# Altium PCB MC15.PcbDoc
Units mm, origin at the board's own origin, x right, y up, seen from the top; angles counter-clockwise.
Board outline 44.17 x 34.76 mm, 6 copper layers (L1, L2, L3, L4, L5, L6), stack 1.839 mm thick; 54 components, 76 nets, 341 pads, 134 vias.
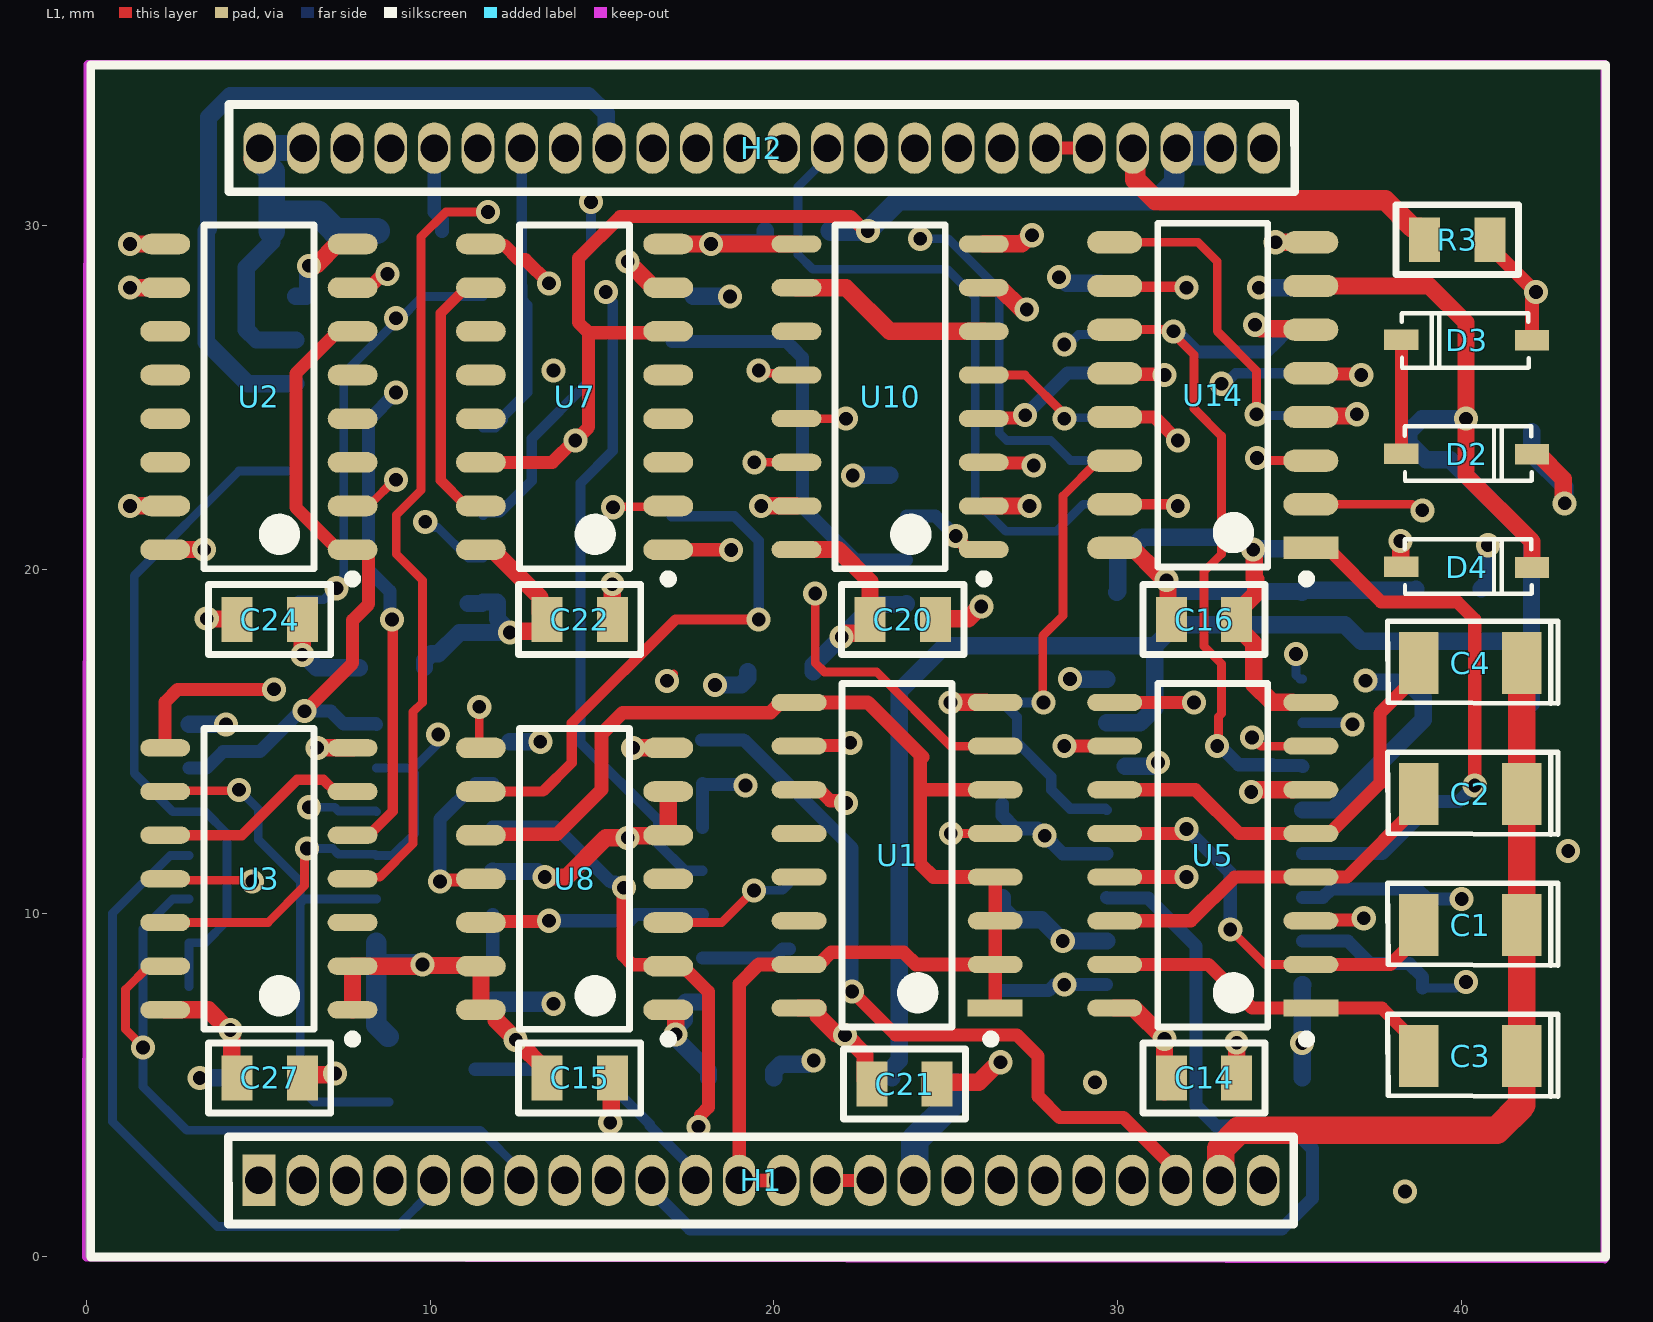
[diagram p0: L1 view]
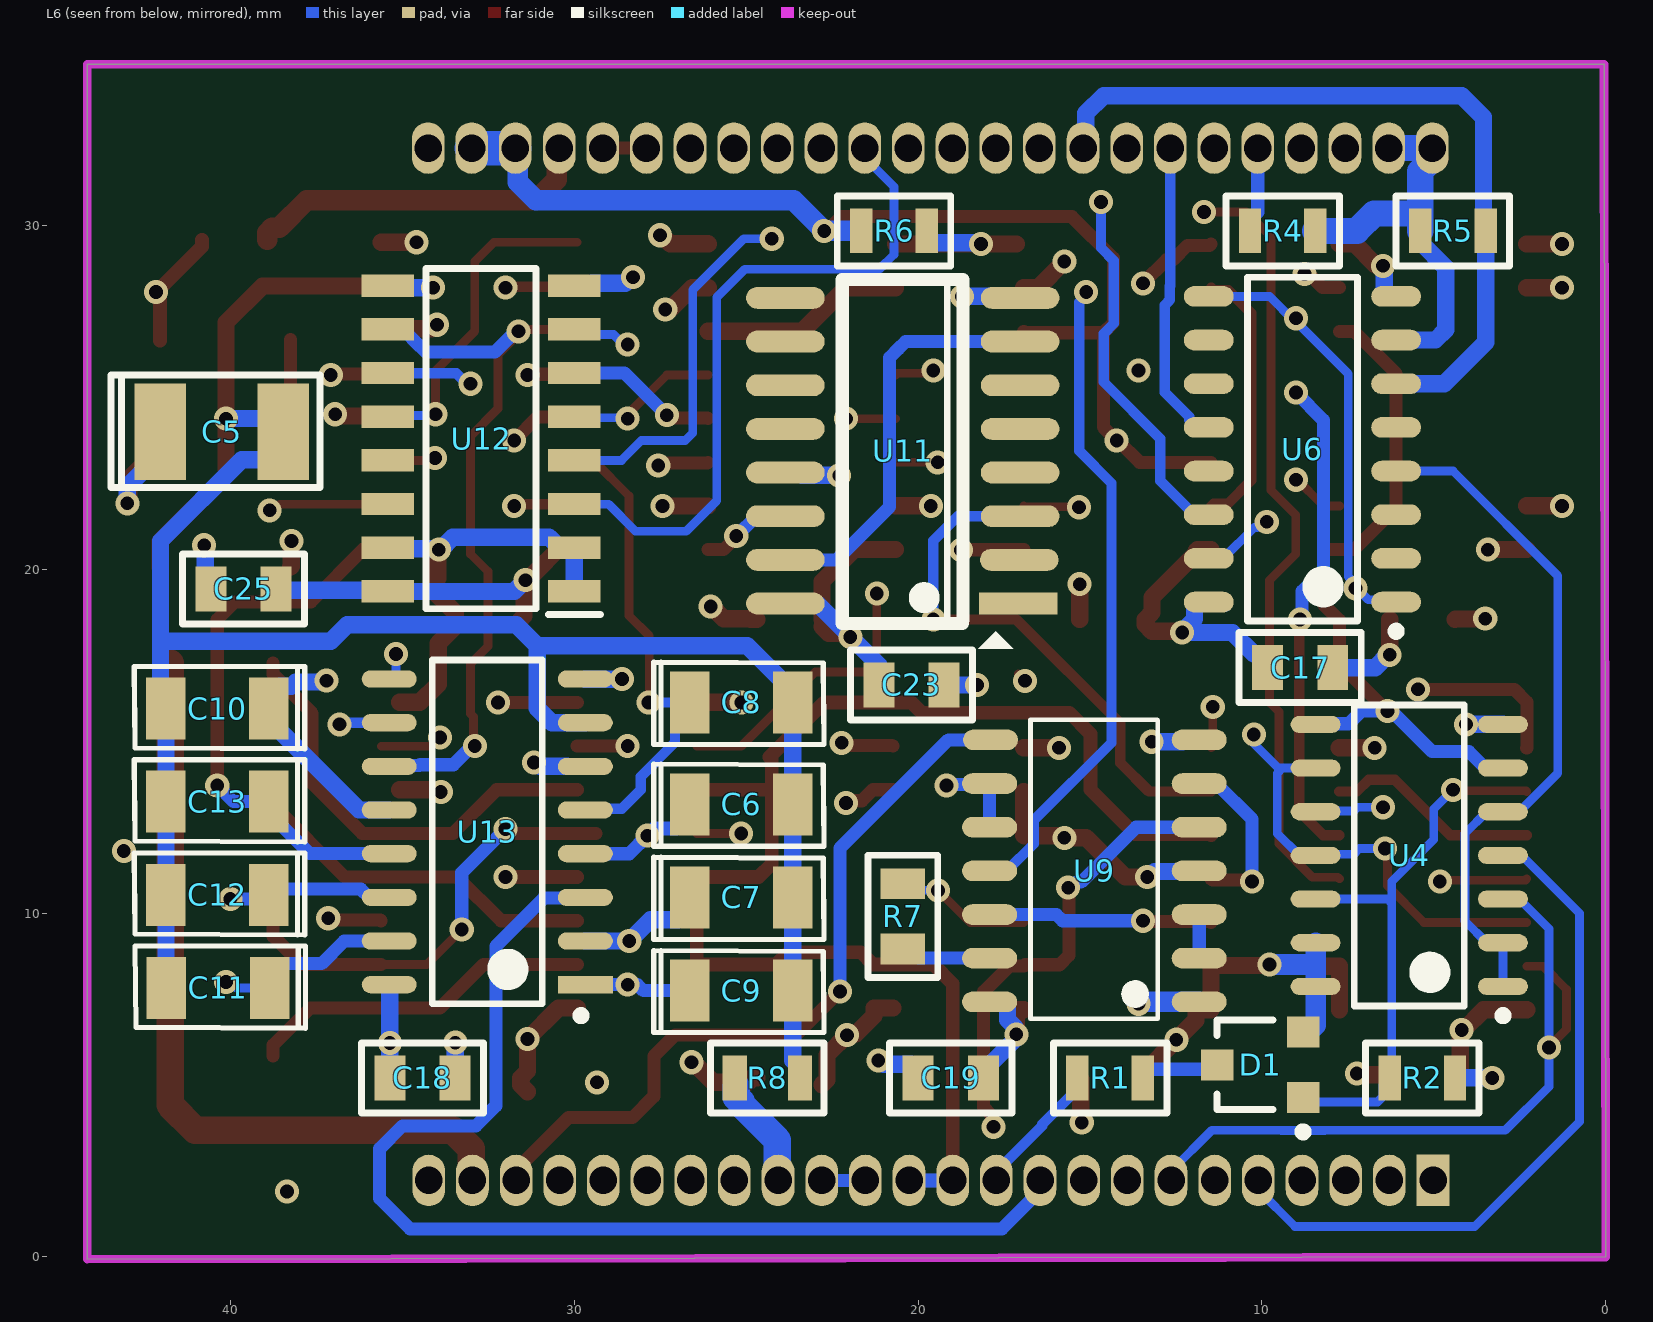
[diagram p1: L6 view, seen from below]
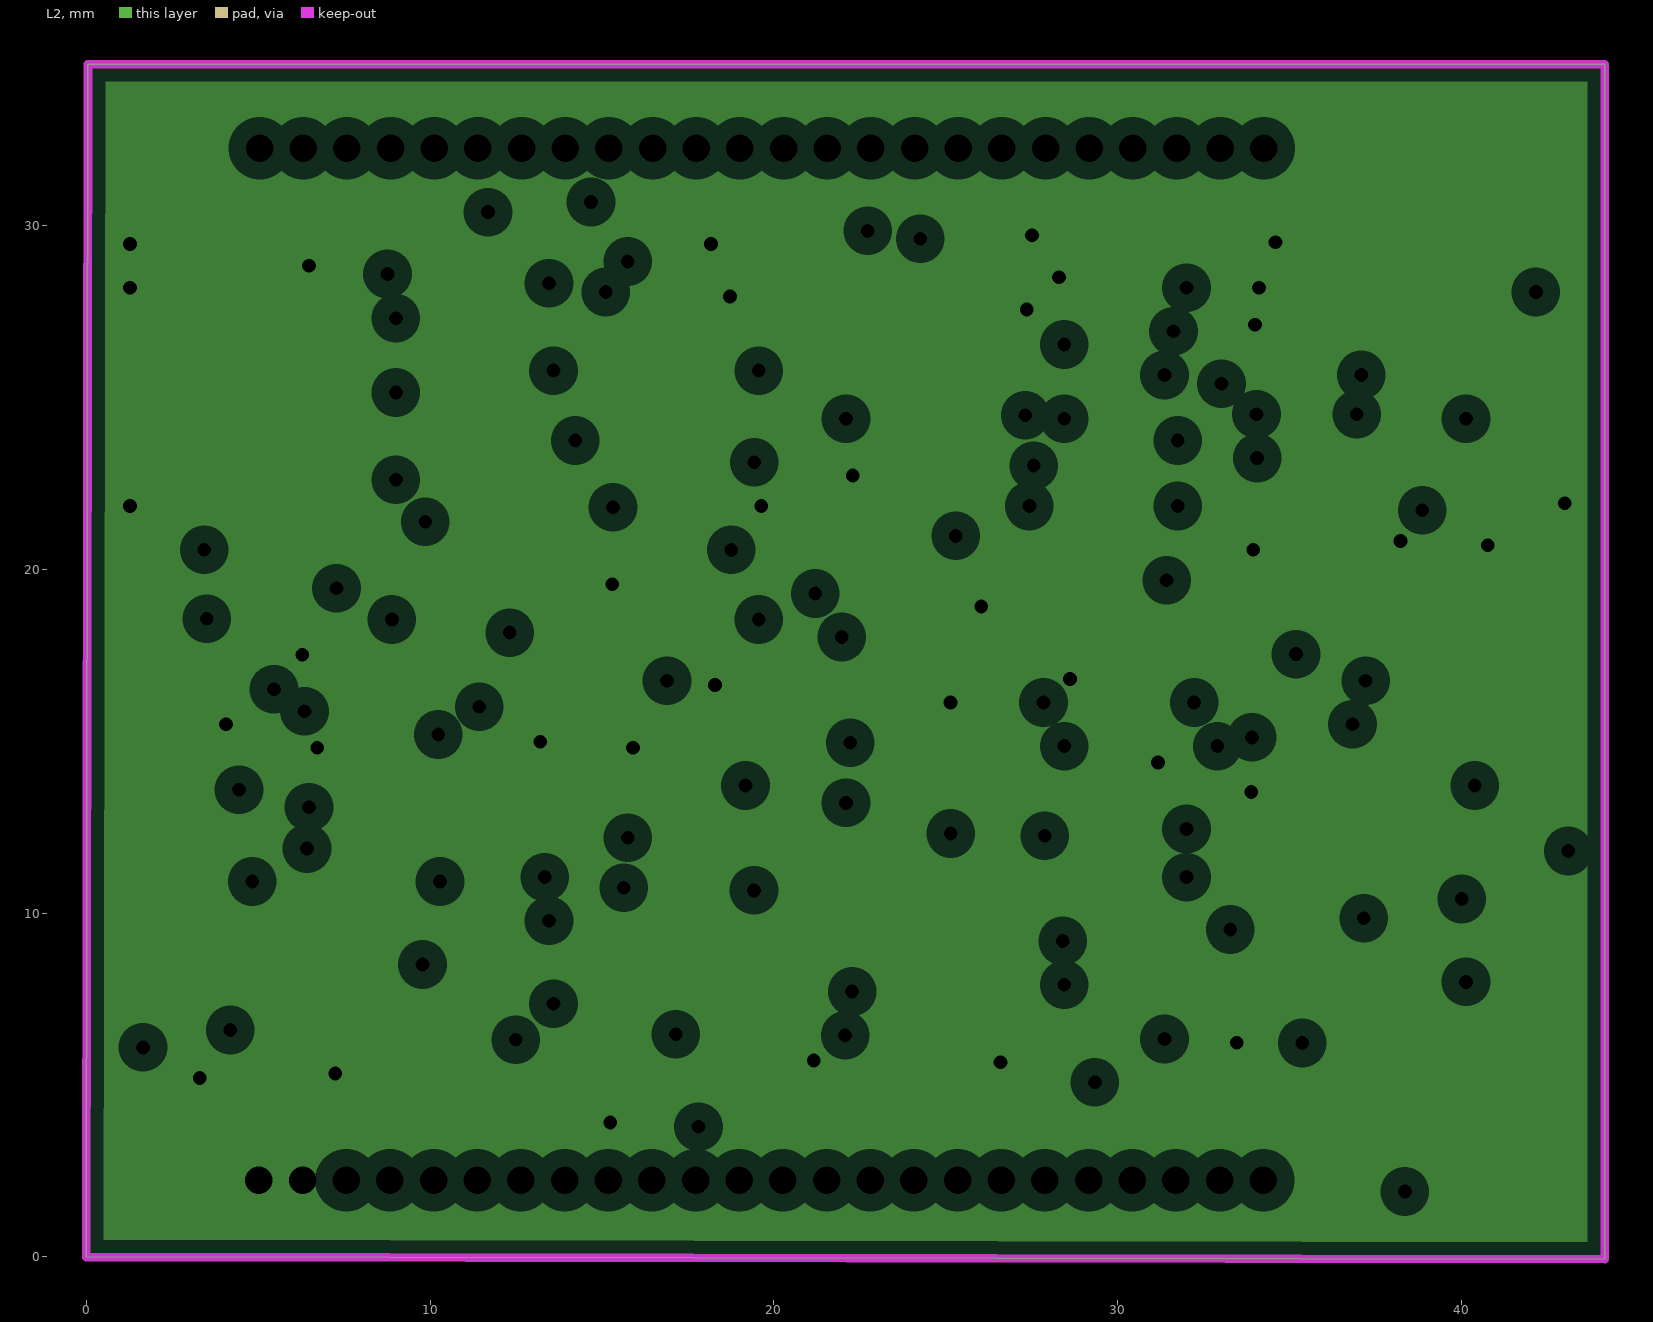
[diagram p2: L2, clearances drawn from the general rule]
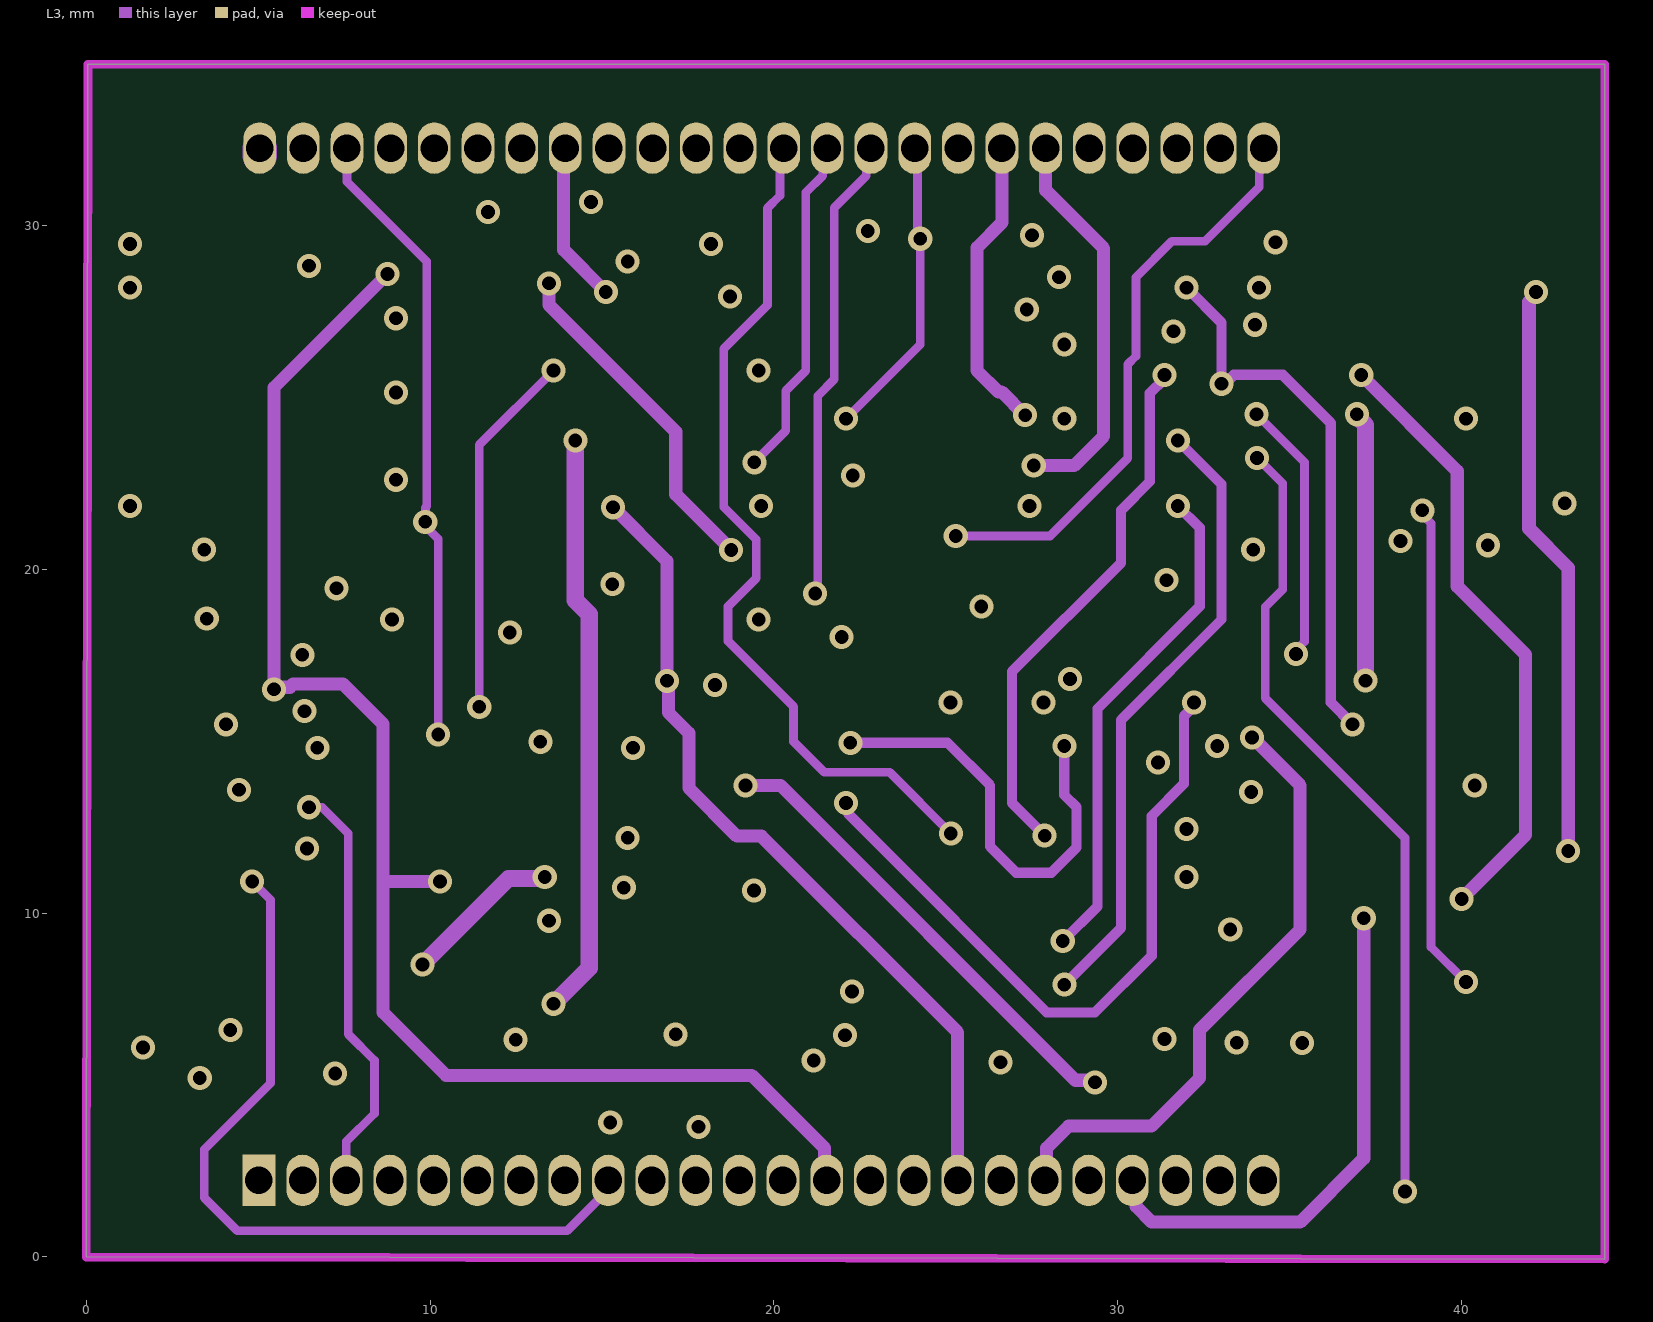
[diagram p3: L3]
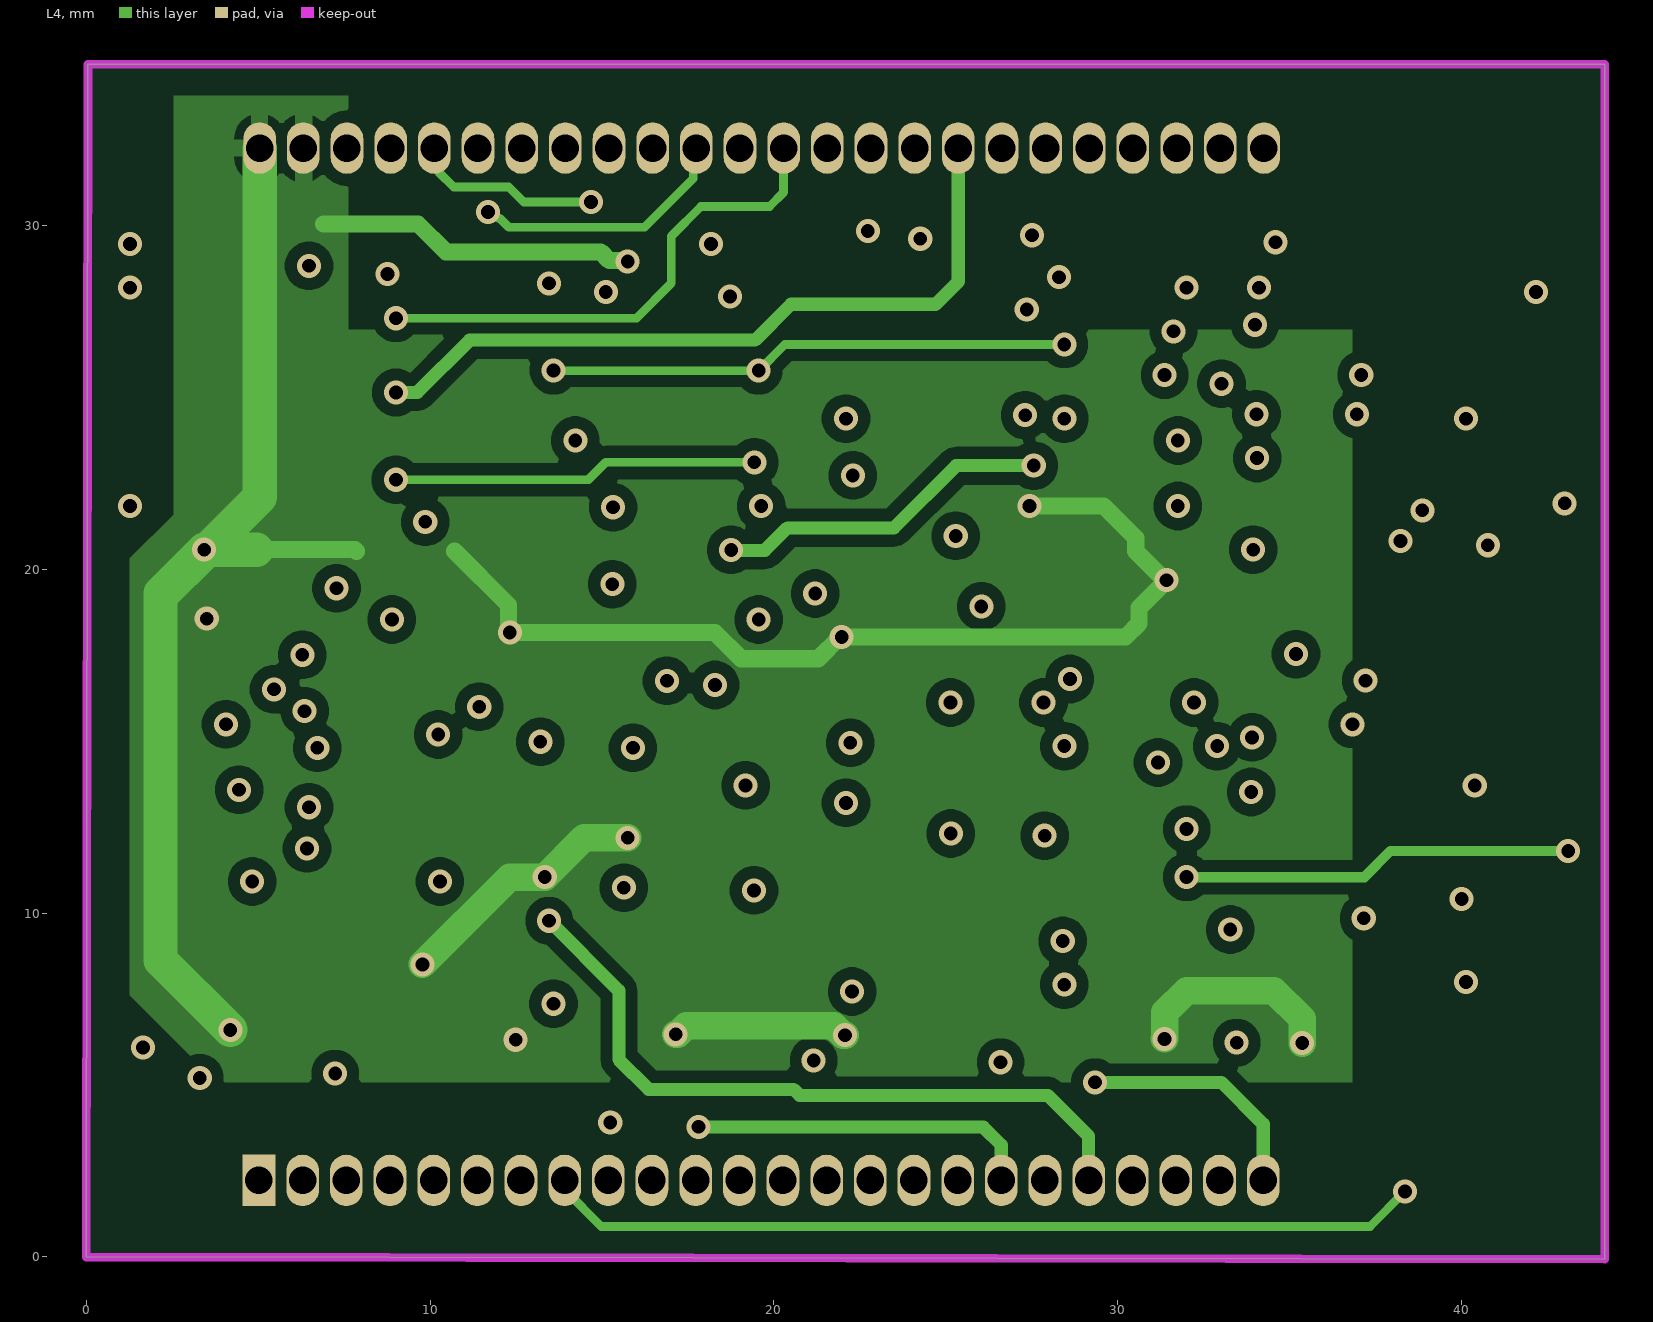
[diagram p4: L4]
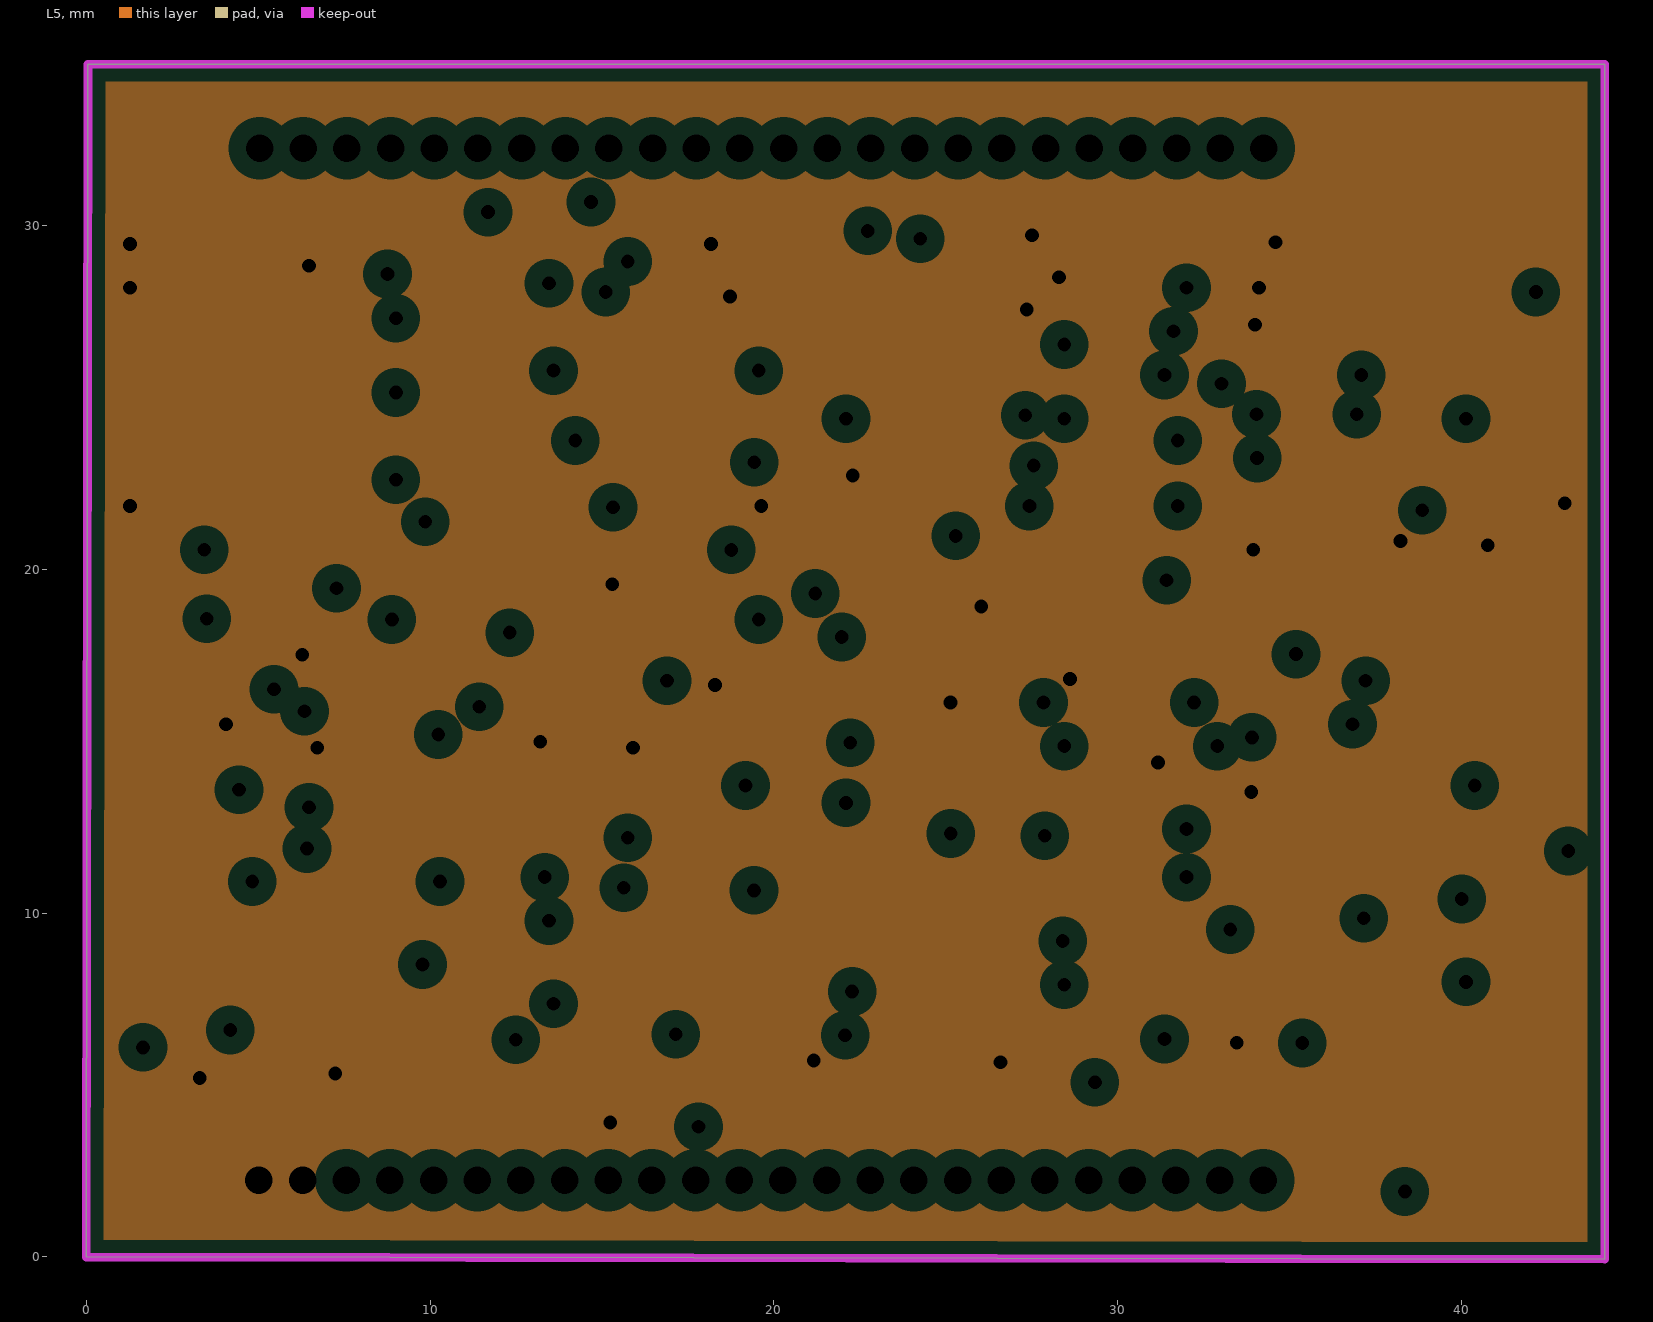
[diagram p5: L5, clearances drawn from the general rule]

## Layer stack, top to bottom
Top Solder: solder mask 0.0102, Solder Resist, Dk 3.5
L1: signal copper 0.0356
Dielectric 4: prepreg 0.0711, PP-006, Dk 4.1
L2: plane copper 0.035, net 2_1
Dielectric 2: prepreg 0.2104, PP-006, Dk 4.1
L3: signal copper 0.035
Dielectric 1: dielectric 1.065, FR-4, Dk 4.8
L4: signal copper 0.035
Dielectric 3: prepreg 0.2104, PP-006, Dk 4.1
L5: plane copper 0.035, net 2_1
Dielectric 5: prepreg 0.0711, PP-006, Dk 4.1
L6: signal copper 0.0356
Bottom Solder: solder mask 0.0102, Solder Resist, Dk 3.5

## Board outline
0,0 44.171,-0.065 44.171,34.692 0.049,34.692 0.049,34.688

## Design rules (kind name [scope] priority, off if disabled: settings)
Clearance [All] p1: gap=0.254 ignorepadtopadclearanceinfootprint=FALSE except(0.35: Arc-Fill Arc-Poly Arc-Region Track-Fill Track-Poly Track-Region SMDPad-Fill SMDPad-Poly SMDPad-Region THPad-Fill THPad-Poly THPad-Region Via-Fill Via-Poly Via-Region Fill-Fill Fill-Poly Fill-Region Poly-Poly Poly-Region Region-Region)
MinimumSolderMaskSliver [All] p1: minsoldermaskwidth=0.102
PlaneClearance [All] p1: clearance=0.508
PlaneConnect [All] p1: planeconnectstyle=Relief reliefexpansion=0.508 reliefentries=4 reliefconductorwidth=0.254 reliefairgap=0.254
PolygonConnect PolygonConnect_VIA [IsVia] p1: connectstyle=Direct reliefconductorwidth=0.254 reliefentries=4 polygonreliefangle="90 Angle" airgapwidth=0.254
PolygonConnect [All] p2: connectstyle=Relief reliefconductorwidth=0.508 reliefentries=4 polygonreliefangle="90 Angle" airgapwidth=0.254
RoutingVias [All] p1: holewidth=0.35 width=0.7 viastyle="Through Hole" minholewidth=0.3 minwidth=0.5 maxholewidth=0.4 maxwidth=1
SilkToSolderMaskClearance [IsPad] p1: minsilkscreentomaskgap=0.102 clearancetoexposedcopper=TRUE
SolderMaskExpansion [All] p1: expansion=0.102 istentingtop=FALSE
Width Width_PWR [(InNet('GND_9V') OR InNet('+5V') OR InNet('+9V'))] p1: maxlimit=2.54 minlimit=0.381 preferedwidth=0.762
Width [All] p2: maxlimit=2.54 minlimit=0.254 preferedwidth=0.381
26 further rules are at their usual default settings.

## Components (designator, comment, footprint, x,y, rotation, side; value= is the part's Value field where it differs from the comment)
C1 "6.8uF/16V" 3216 40.259,9.652 r180 top value="47uF/16 - 50V"
C2 "6.8uF/16V" 3216 40.259,13.462 r180 top value="47uF/16 - 50V"
C3 "6.8uF/16V" 3216 40.259,5.842 r180 top value="47uF/16 - 50V"
C4 "6.8uF/16V" 3216 40.259,17.272 r180 top value="47uF/16 - 50V"
C5 "22uF/16V" 3528 40.259,24.003 r90 bottom value=10uF/50V
C6 "3.3uF/16V" 3216 25.146,13.166 r180 bottom value=10uF/50V
C7 "3.3uF/16V" 3216 25.146,10.456 r180 bottom value=10uF/50V
C8 "3.3uF/16V" 3216 25.146,16.129 r180 bottom value=10uF/50V
C9 "3.3uF/16V" 3216 25.146,7.747 r180 bottom value=10uF/50V
C10 "3.3uF/16V" 3216 40.386,15.952 r0 bottom value=10uF/50V
C11 "3.3uF/16V" 3216 40.365,7.824 r0 bottom value=10uF/50V
C12 "3.3uF/16V" 3216 40.386,10.534 r0 bottom value=10uF/50V
C13 "3.3uF/16V" 3216 40.386,13.243 r0 bottom value=10uF/50V
C14 "C0.1uF_50V" C0805 32.512,5.207 r180 top
C15 "C0.1uF_50V" C0805 14.351,5.207 r180 top
C16 "C0.1uF_50V" C0805 32.512,18.542 r180 top
C17 "C0.1uF_50V" C0805 8.89,17.145 r0 bottom
C18 "C0.1uF_50V" C0805 34.417,5.207 r0 bottom
C19 "C0.1uF_50V" C0805 19.05,5.207 r180 bottom
C20 "C0.1uF_50V" C0805 23.749,18.542 r180 top
C21 "C0.1uF_50V" C0805 23.8,5.029 r180 top
C22 "C0.1uF_50V" C0805 14.351,18.542 r180 top
C23 "C0.1uF_50V" C0805 20.193,16.637 r0 bottom
C24 "C0.1uF_50V" C0805 5.334,18.542 r180 top
C25 "C0.1uF_50V" C0805 39.624,19.431 r180 bottom
C27 "C0.1uF_50V" C0805 5.334,5.207 r180 top
D1 "BAW56" sot-23 8.803,4.638 r90 bottom
D2 "1N4148" SOD123 40.152,23.353 r0 top
D3 "1N4148" SOD123 40.152,26.67 r180 top
D4 "1N4148" SOD123 40.152,20.066 r0 top
H1 "Header 24" "header 24"#1 19.629,2.228 r0 top
H2 "Header 24" "header 24"#2 19.648,32.254 r180 top
R1 "20k" R0805#1 14.417,5.207 r180 bottom
R2 "20k" R0805#1 5.334,5.207 r180 bottom
R3 "10k" C0805 39.878,29.591 r180 top
R4 "10k" R0805#1 9.398,29.845 r180 bottom
R5 "10k" R0805#1 4.445,29.845 r180 bottom
R6 "51k" R0805#1 20.701,29.845 r180 bottom
R7 "51k" C0805 20.447,9.906 r270 bottom
R8 "10k" R0805#2 24.384,5.207 r180 bottom
U1 "U1-MC14008" soic16n#1 23.585,11.684 r180 top
U2 "CD4520BM" D0016A_N#1 5.022,25.019 r180 top
U3 "CD4001BM" D0014A_N#1 5.022,10.999 r180 top
U4 "CD4011BM" D0014A_N#1 5.715,11.68 r0 bottom
U5 "U5-CD4052" soic16n#1 32.766,11.684 r180 top
U6 "CD4015BM" D0016A_N#1 8.821,23.495 r0 bottom
U7 "CD4015BM" D0016A_N#1 14.203,25.019 r180 top
U8 "CD4030BM" D0014A_N#2 14.203,10.999 r180 top
U9 "CD4016" SOIC14 14.859,11.231 r0 bottom
U10 "CD4520BM" D0016A_N#2 23.383,25.019 r180 top
U11 "CD4022BCM" SOP16 20.447,23.452 r90 bottom
U12 "MC14008BDR2G" SOIC127P600X175-16N 32.71,23.805 r0 bottom
U13 "KP2-CD4051" soic16n#1 32.532,12.365 r0 bottom
U14 "CD4051" soic16n#2 32.766,25.069 r180 top

## Footprints (in the part's own frame and the unit in brackets; to place one, negate y for a bottom-side part, rotate by r counter-clockwise, add the part's x,y. Pads: shape width x height; smd on the part's side, far side on the other; paste and mask are expansions set on the pad)
3216 [mm] "Tantalum type A 1206"
  rect 1.15x1.8 smd: 1(-1.5,0) 2(1.5,0)
  silkscreen extent -2.54,-1.22 2.41,1.17, body extent -1.7,-0.9 1.7,0.9, height 1
3528 [mm] "Tantalum Type B  1411"
  rect 2.8x1.5 smd: 1(0,1.791) 2(0,-1.791)
  silkscreen extent -1.63,-2.86 1.65,3.21, body extent -1.42,-1.81 1.4,1.88, height 2.11
C0805 [mm]
  rect 0.9x1.3 smd: 1(-0.95,0) 2(0.95,0)
  silkscreen extent -1.78,-1.02 1.78,1.02, body extent -1,-0.6 1,0.6, height 1.5
D0014A_N#1 [mm] "SOIC, 14-Leads, Body 8.75x4mm, Pitch 1.27mm, IPC Medium Density"
  oval 1.45x0.5 smd: 1(-2.725,3.81) 2(-2.725,2.54) 3(-2.725,1.27) 4(-2.725,0) 5(-2.725,-1.27) 6(-2.725,-2.54) 7(-2.725,-3.81) 8(2.725,-3.81) 9(2.725,-2.54) 10(2.725,-1.27) 11(2.725,0) 12(2.725,1.27) 13(2.725,2.54) 14(2.725,3.81)
  silkscreen extent -2.85,-4.38 1.6,4.78, body extent -3.02,-4.32 3.02,4.32, height 1.75
D0014A_N#2 [mm] "SOIC, 14-Leads, Body 8.75x4mm, Pitch 1.27mm, IPC Medium Density"
  oval 1.45x0.6 smd: 1(-2.725,3.81) 2(-2.725,2.54) 3(-2.725,1.27) 4(-2.725,0) 5(-2.725,-1.27) 6(-2.725,-2.54) 7(-2.725,-3.81) 8(2.725,-3.81) 9(2.725,-2.54) 10(2.725,-1.27) 11(2.725,0) 12(2.725,1.27) 13(2.725,2.54) 14(2.725,3.81)
  silkscreen extent -2.85,-4.38 1.6,4.78, body extent -3.02,-4.32 3.02,4.32, height 1.59
D0016A_N#1 [mm] "SOIC, 16-Leads, Body 10x4mm, Pitch 1.27mm, IPC Medium Density"
  oval 1.45x0.6 smd: 1(-2.725,4.445) 2(-2.725,3.175) 3(-2.725,1.905) 4(-2.725,0.635) 5(-2.725,-0.635) 6(-2.725,-1.905) 7(-2.725,-3.175) 8(-2.725,-4.445) 9(2.725,-4.445) 10(2.725,-3.175) 11(2.725,-1.905) 12(2.725,-0.635) 13(2.725,0.635) 14(2.725,1.905) 15(2.725,3.175) 16(2.725,4.445)
  silkscreen extent -2.85,-5 1.6,5.42, body extent -3,-4.95 3,4.95, height 1.59
D0016A_N#2 [mm] "SOIC, 16-Leads, Body 10x4mm, Pitch 1.27mm, IPC Medium Density"
  oval 1.45x0.5 smd: 1(-2.725,4.445) 2(-2.725,3.175) 3(-2.725,1.905) 4(-2.725,0.635) 5(-2.725,-0.635) 6(-2.725,-1.905) 7(-2.725,-3.175) 8(-2.725,-4.445) 9(2.725,-4.445) 10(2.725,-3.175) 11(2.725,-1.905) 12(2.725,-0.635) 13(2.725,0.635) 14(2.725,1.905) 15(2.725,3.175) 16(2.725,4.445)
  silkscreen extent -2.85,-5 1.6,5.42, body extent -3,-4.95 3,4.95, height 1.75
"header 24"#1 [mm]
  rect 0.95x1.5 hole 0.8: 1(-14.605,0)
  oval 0.95x1.5 hole 0.8: 2(-13.335,0) 3(-12.065,0) 4(-10.795,0) 5(-9.525,0) 6(-8.255,0) 7(-6.985,0) 8(-5.715,0) 9(-4.445,0) 10(-3.175,0) 11(-1.905,0) 12(-0.635,0) 13(0.635,0) 14(1.905,0) 15(3.175,0) 16(4.445,0) 17(5.715,0) 18(6.985,0) 19(8.255,0) 20(9.525,0) 21(10.795,0) 22(12.065,0) 23(13.335,0) 24(14.605,0)
  silkscreen extent -15.5,-1.27 15.49,1.27
"header 24"#2 [mm]
  oval 0.95x1.5 hole 0.8: 1(-14.605,0) 2(-13.335,0) 3(-12.065,0) 4(-10.795,0) 5(-9.525,0) 6(-8.255,0) 7(-6.985,0) 8(-5.715,0) 9(-4.445,0) 10(-3.175,0) 11(-1.905,0) 12(-0.635,0) 13(0.635,0) 14(1.905,0) 15(3.175,0) 16(4.445,0) 17(5.715,0) 18(6.985,0) 19(8.255,0) 20(9.525,0) 21(10.795,0) 22(12.065,0) 23(13.335,0) 24(14.605,0)
  silkscreen extent -15.5,-1.27 15.49,1.27
R0805#1 [mm]
  rect 0.65x1.3 smd: 1(-0.95,0) 2(0.95,0)
  silkscreen extent -1.65,-1.02 1.65,1.02, body extent -1,-0.6 1,0.6, height 0.7
R0805#2 [mm]
  rect 0.7x1.3 smd: 1(-0.95,0) 2(0.95,0)
  silkscreen extent -1.65,-1.02 1.65,1.02, body extent -1,-0.6 1,0.6, height 0.7
SOD123 [mm]
  rect 1x0.6 smd: 1(-1.899,0.01) 2(1.899,-0.01)
  silkscreen extent -1.8,-0.78 1.89,0.81, body extent -1.8,-0.8 1.9,0.8, height 1.27
SOIC14 [mm]
  oval 1.6x0.6 smd: 1(-3.035,3.81) 2(-3.035,2.54) 3(-3.035,1.27) 4(-3.035,0) 5(-3.035,-1.27) 6(-3.035,-2.54) 7(-3.035,-3.81) 8(3.035,-3.81) 9(3.06,-2.54) 10(3.06,-1.27) 11(3.06,0) 12(3.06,1.27) 13(3.06,2.54) 14(3.06,3.81)
  silkscreen extent -1.83,-4.4 1.88,4.3, body extent -2.97,-4.37 3.03,4.38, height 1.75
soic16n#1 [mm] "SOIC, 16-Leads, Body 9.90x3.90mm, Pitch 1.27mm, IPC Medium Density"
  rect 1.6x0.5 smd: 1(-2.852,4.445)
  oval 1.6x0.5 smd: 2(-2.852,3.175) 3(-2.852,1.905) 4(-2.852,0.635) 5(-2.852,-0.635) 6(-2.852,-1.905) 7(-2.852,-3.175) 8(-2.852,-4.445) 9(2.852,-4.445) 10(2.852,-3.175) 11(2.852,-1.905) 12(2.852,-0.635) 13(2.852,0.635) 14(2.852,1.905) 15(2.852,3.175) 16(2.852,4.445)
  silkscreen extent -2.85,-5 1.6,5.47, body extent -3.06,-5 3.02,5, height 1.65
soic16n#2 [mm] "SOIC, 16-Leads, Body 9.90x3.90mm, Pitch 1.27mm, IPC Medium Density"
  rect 1.6x0.65 smd: 1(-2.852,4.445)
  oval 1.6x0.65 smd: 2(-2.852,3.175) 3(-2.852,1.905) 4(-2.852,0.635) 5(-2.852,-0.635) 6(-2.852,-1.905) 7(-2.852,-3.175) 8(-2.852,-4.445) 9(2.852,-4.445) 10(2.852,-3.175) 11(2.852,-1.905) 12(2.852,-0.635) 13(2.852,0.635) 14(2.852,1.905) 15(2.852,3.175) 16(2.852,4.445)
  silkscreen extent -2.85,-5 1.6,5.47, body extent -3.06,-5 3.02,5, height 1.65
SOIC127P600X175-16N [mm]
  rect 1.525x0.65 smd: 1(-2.712,4.445) 2(-2.712,3.175) 3(-2.712,1.905) 4(-2.712,0.635) 5(-2.712,-0.635) 6(-2.712,-1.905) 7(-2.712,-3.175) 8(-2.712,-4.445) 9(2.712,-4.445) 10(2.712,-3.175) 11(2.712,-1.905) 12(2.712,-0.635) 13(2.712,0.635) 14(2.712,1.905) 15(2.712,3.175) 16(2.712,4.445)
  silkscreen extent -3.47,-4.95 1.6,5.12, body extent -3.01,-4.94 3.01,4.96, height 1.75
SOP16 [mil]
  rect 25x90 smd: 1(-175,-132.45)
  oval 25x90 smd: 2(-125,-133.44) 3(-75,-134.42) 4(-25,-134.42) 5(25,-134.42) 6(75,-134.42) 7(125,-134.41) 8(175,-134.41) 9(175,134.41) 10(125,134.42) 11(75,134.42) 12(25,134.42) 13(-25,134.42) 14(-75,134.42) 15(-125,134.42) 16(-175,134.42)
  silkscreen extent -227,-126 196,70, body extent -197,-119 197,120, height 65
sot-23 [mm]
  rect 0.9x0.95 smd: 1(0,0) 2(1.9,0) 3(0.95,2.5)
  silkscreen extent -1.12,-0.12 2.25,2.5, body extent -0.48,-0.19 2.42,2.61, height 1.3

## Part data
C1 C2 C3 C4: library part CP2, "C 47uF/50V , 220uF/16V", Description 1="470uF/6,3V - 330uF/10V - 220uF/16V", Description 2="100uF/25V - 35V - 47uF/50V - 22uF/100V", Description 3="33uF => 47uF/63V - 1uF => 4,7uF/160V", Description 4="1uF => 2,2uF/250V - 1uF/350V"
C5 C6 C7 C8 C9 C10 C11 C12 C13: library part CP1, "Cap P  0,1uF < 22uF , 16 - 50V", Description 1="10 => 220uF/6,3V/10V - 10uF => 100uF/16V", Description 2="0,1uF => 33uF/50V - 10uF => 22uF/63V", Description 3="0,47uF => 10uF/100V"
D1: library part UF3
D2 D3 D4: library part "Diode S4", "Dán", Chung_Loai=Dán, Don_Vi=Con, Ma_Hang=MH005519, Ten_Linh_Kien="Diode S4 SOD123 ( 1N5819 SOD123)"
R1 R2 R3 R4 R5 R6 R7 R8: library part Res, "Standard resistor", ASiD Part Number=Res-AS
U2 U10: "CMOS Dual Binary Up-Counter, D0016A, TUBE", F @ Nom Voltage(Max)(Mhz)=8, Generic Part Number=CD4520B, ICC @ Nom Voltage(Max)(mA)=0.03, Manufacturer="Texas Instruments", Operating Temperature Range(C)="-55 to 125", Rating=Catalog, Supplier Part Number 1=595-CD4520BM, tpd @ Nom Voltage(Max)(ns)=230, Voltage(Nom)(V)=5,10,15, Bits(#)=4, Code_JEDEC="MS-012 variation AC", ComponentLink1Description="Manufacturer URL", ComponentLink1URL=http://www.ti.com/, ComponentLink2Description=Datasheet, ComponentLink2URL=http://www.ti.com/lit/ds/symlink/cd4520b.pdf, ComponentLink3Description="Package Specification", ComponentLink3URL=http://www.ti.com/lit/ml/mpds178g/mpds178g.pdf, DatasheetVersion=SCHS076D, Function=Counter, Input Type=CMOS, Inputs=1, Output Drive (IOL/IOH)(Max)(mA)=1.5/-1.5, Output Type=CMOS, PackageReference=D0016A, PartNumber=CD4520BM, Schmitt Trigger=No, Supplier 1=Mouser, Supplier 2=Digi-Key, Supplier Part Number 2=296-32927-5-ND, Technology Family=CD4000, Type=Binary, VCC(Max)(V)=18, VCC(Min)(V)=3
U3: "CMOS Quad 2-Input NOR Gate, D0014A, TUBE", F @ Nom Voltage(Max)(Mhz)=8, Generic Part Number=CD4001B, ICC @ Nom Voltage(Max)(mA)=0.015, Manufacturer="Texas Instruments", Operating Temperature Range(C)="-55 to 125", Rating=Military, tpd @ Nom Voltage(Max)(ns)=120, Voltage(Nom)(V)=10, Bits(#)=4, Code_JEDEC=MS-012, ComponentLink1Description="Manufacturer URL", ComponentLink1URL=http://www.ti.com/, ComponentLink2Description=Datasheet, ComponentLink2URL=http://www.ti.com/lit/ds/symlink/cd4001b.pdf, ComponentLink3Description="Package Specification", ComponentLink3URL=http://www.ti.com/lit/ml/mpds177g/mpds177g.pdf, DatasheetVersion=SCHS015C, Input Type=CMOS, Output Drive (IOL/IOH)(Max)(mA)=1.5/-1.5, Output Type=CMOS, PackageReference=D0014A, PartNumber=CD4001BM, VCC(Max)(V)=18, VCC(Min)(V)=3
U4: "CMOS Quad 2-Input NAND Gate, D0014A, TUBE", F @ Nom Voltage(Max)(Mhz)=8, Generic Part Number=CD4011B, ICC @ Nom Voltage(Max)(mA)=0.015, Manufacturer="Texas Instruments", Operating Temperature Range(C)="-55 to 125", Rating=Military, Supplier Part Number 1=595-CD4011BM, Voltage(Nom)(V)=10, Bits(#)=4, Code_JEDEC=MS-012, ComponentLink1Description="Manufacturer URL", ComponentLink1URL=http://www.ti.com/, ComponentLink2Description=Datasheet, ComponentLink2URL=http://www.ti.com/lit/ds/symlink/cd4011b.pdf, ComponentLink3Description="Package Specification", ComponentLink3URL=http://www.ti.com/lit/ml/mpds177g/mpds177g.pdf, DatasheetVersion=SCHS021D, Input Type=CMOS, Output Drive (IOL/IOH)(Max)(mA)=1.5/-1.5, Output Type=CMOS, PackageReference=D0014A, PartNumber=CD4011BM, Schmitt Trigger=No, Supplier 1=Mouser, Supplier 2=Digi-Key, Supplier Part Number 2=296-3507-5-ND, Technology Family=CD4000, VCC(Max)(V)=18, VCC(Min)(V)=3
U6 U7: "CMOS Dual 4-Stage Static Shift Register, D0016A, TUBE", F @ Nom Voltage(Max)(Mhz)=8, Generic Part Number=CD4015B, ICC @ Nom Voltage(Max)(mA)=0.3, Manufacturer="Texas Instruments", Operating Temperature Range(C)="-55 to 125", Rating=Catalog, tpd @ Nom Voltage(Max)(ns)=160, Voltage(Nom)(V)=10, 3-State Output=No, Bits=4, Code_JEDEC="MS-012 variation AC", ComponentLink1Description="Manufacturer URL", ComponentLink1URL=http://www.ti.com/, ComponentLink2Description=Datasheet, ComponentLink2URL=http://www.ti.com/lit/ds/symlink/cd4015b.pdf, ComponentLink3Description="Package Specification", ComponentLink3URL=http://www.ti.com/lit/ml/mpds178g/mpds178g.pdf, DatasheetVersion=SCHS025D, Input Type=CMOS, Output Drive (IOL/IOH)(Max)(mA)=1.5/-1.5, Output Type=CMOS, PackageReference=D0016A, PartNumber=CD4015BM, Technology Family=CD4000, VCC(Max)(V)=18, VCC(Min)(V)=3
U8: "CMOS Quad Exclusive-OR Gate, D0014A, TUBE", F @ Nom Voltage(Max)(Mhz)=8, Generic Part Number=CD4030B, ICC @ Nom Voltage(Max)(mA)=0.015, Manufacturer="Texas Instruments", Operating Temperature Range(C)="-55 to 125", Rating=Military, Supplier Part Number 1=595-CD4030BM, tpd @ Nom Voltage(Max)(ns)=130, Voltage(Nom)(V)=10, Bits(#)=4, ComponentLink1Description="Manufacturer URL", ComponentLink1URL=http://www.ti.com/, ComponentLink2Description=Datasheet, ComponentLink2URL=http://www.ti.com/lit/ds/symlink/cd4030b.pdf, DatasheetVersion=SCHS035C, Input Type=CMOS, Output Drive (IOL/IOH)(Max)(mA)=1.5/-1.5, Output Type=CMOS, PackageReference=D0014A, PartNumber=CD4030BM, Schmitt Trigger=No, Supplier 1=Mouser, Supplier 2=Digi-Key, Supplier Part Number 2=296-14263-5-ND, Technology Family=CD4000, VCC(Max)(V)=18, VCC(Min)(V)=3
U11: "Divide by 8 Counter/Divider with 8 Decoded Outputs", Code_IPC=SOIC127P600-16, ComponentLink1Description="Manufacturer Link", ComponentLink1URL=http://www.fairchildsemi.com/, ComponentLink2Description=Datasheet, ComponentLink2URL=http://www.fairchildsemi.com/ds/CD%2FCD4017BC.pdf, DatasheetVersion=Jan-1999, LatestRevisionDate=13-Apr-2006, LatestRevisionNote="IPC-7351 Footprint Added.", Note="NC pins 6 and 9 are not drawn.", PackageDescription="16-Pin Small Outline Integrated Circuit 1.27 mm Pitch", PackageReference=M16A, PackageVersion=2000, Published=17-Jul-2002, Publisher="Altium Limited"
U12: "THAY THẾ CD4008", Manufacturer_Name=onsemi, Mouser Part Number=863-MC14008BDR2G, Arrow Part Number=MC14008BDR2G, Arrow Price/Stock=https://www.arrow.com/en/products/mc14008bdr2g/on-semiconductor?utm_currency=USD&region=nac, Datasheet Link=https://www.onsemi.com/pub/Collateral/MC14008B-D.PDF, Height=1.75mm, Manufacturer_Part_Number=MC14008BDR2G, Mouser Price/Stock=https://www.mouser.co.uk/ProductDetail/onsemi/MC14008BDR2G?qs=k%252B8dvkBktS20Fsy6mJwU%252Bg%3D%3D

## Via types
v1: diameter 0.7, hole 0.4, L1 to L6, tented both sides, 134 vias

## Nets (pads, with @x,y where several pads share a name; then routed paths per layer and width w, separated by ;. In a path a pad name is that pad's centre, name@x,y a point inside that pad or via, vN(x,y) a via of type N, cw(c..) or ccw(c..) an arc to the next point about the centre after c; other vN are vias at no path point)
2_1: C5.1 C14.1 C15.1 C16.1 C17.1 C18.1 C19.1 C20.1 C21.1 C22.1 C23.1 C24.1 C25.1 C27.1 D2.2 D4.1 H1.1 H1.2 R2.2 R6.2 U1.8 U2.8 U2.9 U2.10 U2.15 U3.7 U4.7 U5.6 U5.8 U6.8 U7.8 U8.7 U9.7 U10.7 U10.8 U10.9 U10.15 U11.8 U11.13 U12.1 U12.2 U12.8 U12.9 U12.15 U13.6 U13.8 U14.6 U14.8 | length 65.5
  L1 w0.508: v1(1.27,21.844) U2.15 ; v1(1.27,28.194) U2.10 ; v1(1.27,29.464) U2.9 ; C27.1 6.374,5.297 7.202,5.297 v1(7.239,5.334) ; v1(6.284,17.515) C24.1 ; v1(6.477,28.829) 6.514,28.866 6.699,28.866 7.297,29.464 U2.8 ; v1(6.72,14.809) U3.7 ; v1(15.24,3.912) 15.271,3.942 15.271,5.177 C15.1 ; C22.1 v1(15.301,19.569) ; v1(15.901,14.809) U8.7 ; U7.8@17.145,29.464 v1(18.172,29.464) U10.9 ; v1(19.631,21.844) U10.15 ; C21.1@24.699,5.207 24.823,5.207 24.946,5.084 25.962,5.084 26.542,5.664 v1(26.594,5.664) ; C20.1 24.874,18.542 24.895,18.563 25.649,18.563 26.009,18.923 v1(26.035,18.923) ; v1(25.135,16.129) U1.8@26.162,16.129 ; U10.7 26.575,28.194 27.174,27.596 27.319,27.596 v1(27.356,27.559) ; U10.8 26.112,29.468 27.206,29.468 27.456,29.718 v1(27.508,29.718) ; C14.1 v1(33.462,6.234) ; v1(33.884,13.524) 33.936,13.524 34.001,13.589 U5.6@35.072,13.589 ; v1(33.94,20.574) 33.977,20.537 33.977,19.745 34.011,19.711 34.011,19.291 33.462,18.742 C16.1 33.462,18.342 33.96,17.844 33.96,16.66 34.49,16.129 U5.8@35.072,16.129 ; v1(33.992,27.114) 34.044,27.114 34.157,27.001 35.591,27.001 U14.6 ; v1(34.591,29.514) U14.8 ; v1(38.227,20.828) 38.24,20.815 38.24,20.089 D4.1 ; D2.2 42.251,23.343 42.965,22.629 42.965,21.957 v1(43.002,21.92)
  L6 w0.508: U4.7 2.994,15.494 v1(4.064,15.494) ; v1(3.302,5.207) R2.2 ; U6.8 6.398,27.94 6.44,27.982 6.44,28.792 v1(6.477,28.829) ; v1(6.284,17.515) 6.336,17.515 6.706,17.145 C17.1 ; U9.7@12.319,14.986 v1(13.208,14.986) ; U11.8@17.653,27.94 v1(18.723,27.94) ; v1(18.172,29.464) 18.209,29.501 19.68,29.501 19.751,29.572 R6.2 ; v1(18.288,16.637) 19.047,16.637 19.241,16.831 C23.1@19.241,17.016 ; C19.1 20,5.407 20.196,5.603 20.994,5.603 21.106,5.715 v1(21.158,5.715) ; v1(22.298,22.733) U11.13@23.368,22.733 ; v1(28.296,28.499) 28.348,28.499 28.525,28.321 29.489,28.321 29.563,28.247 U12.8@29.563,28.222 ; v1(28.61,16.81) U13.8 ; U12.1@29.97,19.332 U12.1 U12.2 30.435,20.63 30.736,20.931 33.531,20.931 33.888,20.574 v1(33.94,20.574) 33.968,20.602 35.024,20.602 U12.15@35.052,20.574 ; U13.6@30.226,14.274 31.012,14.274 31.121,14.384 v1(31.173,14.384) ; v1(33.462,6.234) 33.465,6.231 33.465,5.21 C18.1 ; v1(34.109,28.194) U12.9@35.179,28.194 ; C25.1 40.73,19.587 40.73,20.664 v1(40.767,20.701) ; C5.1 42.05,23.353 43.002,22.401 v1(43.002,21.92)
2_3: H1.3 U4.10 | length 14.2
  L3 w0.254: v1(6.477,13.081) 6.858,13.081 7.62,12.319 7.62,6.477 8.382,5.715 8.382,4.176 7.564,3.358 H1.3
  L6 w0.254: v1(6.477,13.081) 7.225,13.081 7.334,12.972 8.418,12.972 U4.10
2_4: H1.4
2_5: H1.5 U4.4 | length 20.3
  L6 w0.254: U4.4 2.448,11.68 0.762,9.994 0.762,3.937 3.81,0.889 9.04,0.889 10.104,1.953 H1.5
2_6: H1.6
2_7: H1.7 U3.13 U4.3 | length 21.9
  L1 w0.254: v1(1.651,6.096) 1.651,6.114 1.143,6.622 1.143,7.78 1.822,8.459 U3.13
  L6 w0.254: U4.3 2.515,10.41 1.651,9.546 v1(1.651,6.096) 1.651,4.953 2.921,3.683 8.167,3.683 8.17,3.68 9.436,3.68 9.439,3.683 11.463,3.683 12.644,2.503 H1.7
2_8: H1.8 U14.3 | length 50.7
  L1 w0.254: v1(34.055,23.241) 34.132,23.164 U14.3
  L3 w0.254: v1(34.055,23.241) 34.798,22.498 34.798,19.416 34.29,18.908 34.29,16.256 38.354,12.192 v1(38.354,1.905)
  L4 w0.254: H1.8 13.914,1.953 14.977,0.889 37.338,0.889 v1(38.354,1.905)
2_9: H1.9 U3.11 | length 25.9
  L1 w0.254: U3.11 2.335,10.961 4.788,10.961 v1(4.827,10.922)
  L3 w0.254: v1(4.827,10.922) 5.359,10.39 5.359,5.055 3.429,3.124 3.429,1.727 4.394,0.762 13.993,0.762 15.184,1.953 H1.9
  L6 w0.254: H1.9@15.07,2.342 H1.9
2_10: H1.10 U13.3 | length 33.5
  L6 w0.381: H1.10 16.454,1.922 17.563,0.813 34.773,0.813 35.662,1.702 35.662,3.15 35.001,3.81 32.868,3.81 32.283,4.394 32.283,9.044 30.89,10.438 29.703,10.438 U13.3
2_11: H1.11 R1.1 | length 4
  L6 w0.3: R1.1 15.367,4.882 16.386,3.863 16.386,3.813 17.724,2.476 H1.11
2_12: H1.12 H1.13 U1.1 U1.2 U1.3 U1.4 U1.6 U1.9 U1.15 U8.10 | length 43.7
  L1 w0.4: U8.10 11.503,12.294 13.691,12.294 14.986,13.589 14.986,15.214 15.605,15.833 19.899,15.833 20.195,16.129 22.733,16.129 24.32,14.541 24.257,14.478 24.257,13.589 ; H1.13 H1.12 18.994,7.945 19.558,8.509 U1.15 21.31,8.509 21.666,8.865 23.774,8.865 24.13,8.509 U1.2 ; U1.1 U1.2 ; U1.6 24.257,13.589 ; 24.257,13.589 24.257,11.43 24.638,11.049 U1.4 U1.3 U1.2
  L6 w0.4: H1.12 H1.13
2_14: H1.14 H1.15 U2.7 U3.8 U8.11 U9.6 | length 56
  L1 w0.381: U3.8 2.292,14.814 2.292,16.14 2.662,16.51 v1(5.461,16.51) ; U2.7 8.231,28.194 8.567,28.53 8.7,28.53 v1(8.761,28.591) ; v1(10.287,10.922) 10.326,10.961 11.439,10.961 U8.11 ; H1.14 H1.15
  L3 w0.381: v1(8.761,28.591) 5.461,25.291 v1(5.461,16.51) 5.522,16.571 5.922,16.571 6.021,16.67 7.46,16.67 8.636,15.494 8.636,10.922 ; v1(10.287,10.922) 8.636,10.922 ; H1.14 21.476,2.286 21.476,3.162 19.355,5.283 10.465,5.283 8.636,7.112 8.636,10.922
  L6 w0.381: v1(10.287,10.922) 10.287,12.734 11.324,13.771 U9.6 ; H1.14 H1.15
2_16: H1.16 R8.1 | length 3.2
  L6 w0.8: H1.16 24.103,2.256 24.103,3.402 25.146,4.445 25.146,4.514 25.284,4.652 R8.1@25.284,4.957
2_17: H1.17 U7.2 | length 26.1
  L1 w0.254: v1(15.323,21.806) 15.342,21.825 16.909,21.825 U7.2 ; v1(16.891,16.758) 17.09,16.957 v1@17.09,16.963
  L3 w0.381: v1@15.324,21.805 16.891,20.238 v1(16.891,16.758) 16.93,16.719 16.93,15.836 17.526,15.24 17.526,13.64 18.923,12.243 19.634,12.243 25.344,6.533 H1.17
2_18: H1.18 U8.2 U9.5 | length 23.6
  L1 w0.381: v1(15.636,10.742) 15.613,10.718 15.613,8.771 15.883,8.501 16.886,8.501 U8.2 17.353,8.459 18.097,7.715 18.097,4.356 17.866,4.126 17.866,3.846 v1(17.805,3.785)
  L4 w0.381: v1(17.805,3.785) 17.813,3.777 26.093,3.777 26.614,3.256 H1.18
  L6 w0.381: U9.5 13.661,12.501 15.261,10.901 15.39,10.901 15.55,10.742 v1(15.636,10.742)
2_19: H1.19 U5.7 | length 19.8
  L1 w0.254: v1(33.909,15.113) 34.163,14.859 U5.7
  L3 w0.381: H1.19 27.935,2.278 27.935,3.17 28.575,3.81 30.988,3.81 32.385,5.207 32.385,6.604 35.306,9.525 35.306,13.716 v1(33.909,15.113)
2_20: H1.20 U8.12 U9.12 | length 27.3
  L1 w0.381: U8.12 11.503,9.754 13.437,9.754 v1(13.462,9.779)
  L4 w0.381: v1(13.462,9.779) 15.494,7.747 15.494,5.74 16.358,4.877 20.575,4.877 20.753,4.699 27.965,4.699 29.154,3.51 H1.20
  L6 w0.381: v1(13.462,9.779) 15.797,9.779 15.978,9.961 U9.12
2_21: H1.21 U5.3 | length 17.2
  L1 w0.381: H1.21@30.424,1.922 H1.21 ; U5.3 35.641,9.802 37.107,9.802 v1(37.157,9.852)
  L3 w0.381: H1.21 30.533,2.119 30.533,1.471 30.988,1.016 35.306,1.016 37.157,2.867 v1(37.157,9.852)
2_22: H1.22 U9.8 | length 22.4
  L1 w0.381: v1(22.276,7.722) 23.539,6.459 27.069,6.459 27.686,5.842 27.686,4.674 28.309,4.052 30.175,4.052 31.694,2.533 H1.22
  L6 w0.381: U9.8 19.122,15.041 22.276,11.887 v1(22.276,7.722)
2_23: C1.1 C2.1 C3.1 C4.1 H1.23 | length 23.1
  L1 w0.8: H1.23 32.993,2.256 32.993,3.148 33.528,3.683 41.021,3.683 41.759,4.421 C3.1 C1.1 C2.1 C4.1
2_24: H1.24 U9.9 U9.10 | length 23.4
  L3 w0.381: v1(19.177,13.716) 20.193,13.716 28.768,5.141 29.276,5.141 v1(29.337,5.08) ; H1.24 H1.24@34.29,2.284
  L4 w0.381: v1(29.337,5.08) 33.02,5.08 34.234,3.866 H1.24
  L6 w0.381: U9.10 U9.9 17.947,13.743 19.15,13.743 v1(19.177,13.716)
2_25: H2.1 U10.1 U11.14 | length 19.8
  L1 w0.381: v1(25.289,20.974) 25.289,20.946 25.661,20.574 U10.1
  L3 w0.254: v1(25.289,20.974) 28.035,20.974 30.29,23.228 30.29,25.963 30.531,26.204 30.531,28.499 31.572,29.54 32.537,29.54 34.12,31.123 34.12,32.12 H2.1
  L6 w0.381: U11.14 24.702,21.547 25.275,20.974 v1(25.289,20.974)
2_26: H2.2 H2.3 R6.1 U7.6 U7.14 U9.1 | length 51.6
  L1 w0.381: U7.14 13.556,23.114 14.191,23.749 v1(14.224,23.749) 14.612,24.137 14.612,26.882 14.318,27.175 14.318,29.05 15.527,30.259 22.233,30.259 22.647,29.845 v1(22.733,29.845) ; 14.65,26.882 16.886,26.882 U7.6
  L3 w0.5: v1(13.589,7.366) 14.63,8.407 14.63,18.694 14.224,19.101 v1(14.224,23.749)
  L6 w0.6: U9.1 13.507,7.421 13.562,7.366 v1(13.589,7.366) ; R6.1 v1(22.733,29.845) 23.622,30.734 31.115,30.734 31.646,31.265 31.646,32.187 H2.3
  L6 w1: H2.3@31.746,32.254 H2.2
2_28: H2.4 R3.2 | length 10.2
  L1 w0.6: H2.4 30.51,32.187 30.51,31.339 31.115,30.734 37.785,30.734 38.578,29.941 38.778,29.941 38.928,29.791 R3.2
2_29: H2.5 H2.6 U7.1 U7.9 U10.3 | length 38.3
  L1 w0.381: U7.9 11.52,29.422 12.164,29.422 12.577,29.009 12.774,29.009 v1(13.462,28.321) ; U7.1 16.931,20.571 18.754,20.571 v1(18.758,20.567) ; U10.3 26.131,23.091 27.399,23.091 27.473,23.018 v1(27.559,23.018) ; H2.6 H2.5
  L3 w0.381: v1(13.462,28.321) 13.462,27.686 17.145,24.003 17.145,22.18 v1(18.758,20.567) ; v1(27.559,23.018) 28.733,23.018 29.591,23.876 29.591,29.337 27.903,31.025 H2.6
  L4 w0.381: v1(18.758,20.567) 18.773,20.552 19.734,20.552 20.391,21.209 23.495,21.209 25.304,23.018 v1(27.559,23.018)
2_31: H2.7 U10.4 U12.6 | length 13.2
  L1 w0.381: U10.4 26.131,24.407 27.145,24.407 27.223,24.484 v1(27.309,24.484)
  L3 w0.381: H2.7 26.633,30.086 25.908,29.36 25.908,25.781 26.528,25.161 26.624,25.161 27.301,24.484 v1(27.309,24.484)
  L6 w0.381: v1(27.309,24.484) 28.535,25.71 U12.6
2_32: H2.8 U3.5 | length 35.8
  L1 w0.3: U3.5 8.222,12.269 8.916,12.963 8.916,18.516 v1(8.89,18.542)
  L4 w0.381: v1(9.006,25.146) 9.627,25.146 11.151,26.67 19.456,26.67 20.498,27.711 24.703,27.711 25.363,28.372 H2.8
  L6 w0.381: v1(8.89,18.542) 8.829,18.603 8.829,19.365 8.211,19.983 8.211,24.34 9.006,25.135 v1(9.006,25.146)
2_33: H2.9 U10.13 U12.4 | length 21.1
  L1 w0.254: U10.13 v1(22.098,24.384)
  L3 w0.254: v1(22.098,24.384) 24.257,26.543 v1(24.257,29.616) 24.175,29.698 24.175,32.172 H2.9
  L6 w0.254: v1(24.257,29.616) 25.07,29.616 26.554,28.132 26.554,23.967 26.772,23.749 28.049,23.749 28.628,23.17 U12.4
2_34: H2.10 U1.7 | length 21.9
  L1 w0.254: v1(21.202,19.297) 21.202,17.279 21.463,17.018 22.987,17.018 25.146,14.859 U1.7
  L3 w0.254: v1(21.202,19.297) 21.273,19.368 21.273,25.044 21.755,25.527 21.755,30.518 22.69,31.453 22.69,32.12 H2.10
2_35: H2.11 U2.2 U10.14 U12.3 | length 43.8
  L1 w0.254: U2.2 8.266,21.844 8.266,21.902 8.97,22.606 v1(9.006,22.606) ; v1(19.431,23.114) U10.14 ; H2.11@21.553,31.79 H2.11
  L3 w0.254: v1(19.431,23.114) 20.345,24.028 20.345,25.197 20.93,25.781 20.93,30.963 21.42,31.453 21.42,32.12 H2.11
  L4 w0.254: v1(9.006,22.606) 14.605,22.606 15.113,23.114 v1(19.431,23.114)
  L6 w0.254: H2.11 21.553,31.979 20.701,31.126 20.701,29.159 21.133,28.727 25.044,28.727 25.857,27.915 25.857,21.996 26.746,21.107 28.219,21.107 29.003,21.891 29.989,21.891 U12.3
2_36: H2.12 U1.5 U6.1 U6.9 | length 54.3
  L1 w0.254: v1(25.146,12.319) U1.5
  L3 w0.254: H2.12 20.179,32.149 20.179,30.872 19.812,30.505 19.812,27.686 18.542,26.416 18.542,21.817 19.489,20.87 19.489,19.743 18.669,18.923 18.669,17.907 20.574,16.002 20.574,14.986 21.463,14.097 23.368,14.097 v1(25.146,12.319)
  L4 w0.254: v1(7.28,19.45) v1@7.365,19.365 ; v1(9.006,27.305) 16.002,27.305 17.018,28.321 17.018,29.693 17.882,30.556 19.872,30.556 20.283,30.967 H2.12 ; v1@25.025,12.319 v1(25.146,12.319)
  L6 w0.254: U6.1 6.162,19.116 6.906,19.116 7.241,19.45 v1(7.28,19.45) 7.28,19.571 7.493,19.784 7.493,25.686 9.006,27.199 v1(9.006,27.305) ; v1@9.059,27.22 9.779,27.94 U6.9
2_37: H2.13
2_38: H2.14 U3.4 | length 31.1
  L1 w0.254: U3.4 7.794,11.046 8.535,11.046 9.505,12.017 9.505,15.855 9.779,16.129 9.779,19.558 9.779,19.685 9.017,20.447 9.017,21.584 9.737,22.303 9.737,29.676 10.453,30.392 v1(11.684,30.392)
  L3 w0.254: v1@11.471,30.394 11.681,30.394 v1(11.684,30.392) ; H2.14@17.743,31.79 H2.14
  L4 w0.254: v1(11.684,30.392) 11.805,30.392 11.985,30.211 12.029,30.211 12.288,29.952 16.236,29.952 17.652,31.368 17.652,32.162 H2.14
2_39: H2.15
2_40: H2.16 R5.2 U6.6 | length 22.8
  L6 w0.508: U6.6 4.699,25.4 3.495,26.604 R5.2 3.556,29.906 3.556,33.147 4.191,33.782 14.605,33.782 15.119,33.268 15.119,32.338 H2.16
2_41: H2.17 U9.11 | length 23.8
  L3 w0.381: H2.17 13.887,32.207 13.887,29.293 v1(15.113,28.067)
  L6 w0.3: v1(15.113,28.067) 15.113,27.981 15.316,27.777 15.316,23.444 14.376,22.504 14.376,14.961 16.637,12.7 16.637,12.013 17.419,11.231 U9.11
2_42: H2.18 U6.12 | length 8.9
  L6 w0.305: U6.12 11.891,24.13 12.119,24.357 12.119,24.438 12.833,25.152 12.833,27.68 12.677,27.836 12.677,28.233 12.663,28.247 H2.18
2_43: H2.19
2_44: H2.20 R4.1 U6.14 | length 18.9
  L4 w0.254: H2.20 10.257,32.12 10.257,31.552 10.686,31.123 12.29,31.123 12.729,30.683 v1(14.681,30.683)
  L6 w0.3: U6.14 11.611,21.655 12.036,21.655 12.954,22.573 12.954,23.8 14.605,25.451 14.605,26.856 14.309,27.152 14.309,28.982 14.681,29.354 v1(14.681,30.683)
  L6 w0.4: H2.20 10.123,30.395 10.348,30.17 R4.1
2_45: H2.21
2_46: H2.22 U3.12 U4.9 U4.11 U6.15 | length 33.6
  L1 w0.254: U3.12 5.284,9.729 6.35,10.795 6.35,11.811 v1(6.422,11.883)
  L3 w0.254: H2.22 7.585,32.252 7.585,31.277 9.906,28.956 9.906,21.835 9.864,21.793 v1@9.864,21.548 ; v1(9.86,21.382) 9.86,21.261 10.236,20.885 v1(10.236,15.198)
  L6 w0.254: v1(6.422,11.883) 7.162,11.883 7.334,11.711 8.409,11.711 U4.11 8.915,11.68 9.554,12.319 9.554,14.072 9.405,14.22 ; U4.9 9.405,14.22 ; v1(9.86,21.382) 9.981,21.382 10.144,21.218 10.223,21.218 11.121,20.32 U6.15 ; v1(10.236,15.198) 10.262,15.172 10.262,14.961 9.521,14.22 9.405,14.22
2_47: C14.2 C15.2 C16.2 C17.2 C18.2 C19.2 C20.2 C21.2 C22.2 C23.2 C24.2 C25.2 C27.2 D1.2 H2.23 H2.24 R4.2 R5.1 U1.16 U2.16 U3.1 U3.2 U3.14 U4.13 U4.14 U5.16 U6.7 U6.16 U7.7 U7.16 U8.1 U8.5 U8.6 U8.13 U8.14 U9.4 U9.14 U10.2 U10.16 U11.16 U12.16 U13.16 U14.16 | length 178.9
  L1 w0.5: U3.14 3.552,7.189 4.137,6.604 v1(4.191,6.604) v1@4.245,6.604 ; U2.16 v1(3.429,20.574) ; v1(3.505,18.567) 3.518,18.555 4.371,18.555 C24.2 ; v1@4.229,6.566 4.229,5.362 C27.2 ; U3.1 U3.2 9.675,8.459 9.725,8.509 v1(9.779,8.509) 9.81,8.478 11.459,8.478 U8.13 U8.14 11.876,7.189 11.922,7.143 11.922,6.886 v1(12.49,6.318) 13.401,5.407 C15.2 ; U7.16 11.876,20.574 11.922,20.528 11.922,20.463 13.201,19.184 13.201,18.742 C22.2 13.401,18.399 13.201,18.199 12.357,18.199 v1(12.319,18.161) ; v1(13.335,11.049) 13.97,11.049 15.113,12.192 v1(15.748,12.192) 15.806,12.25 16.909,12.25 U8.5 U8.6 ; v1(15.748,28.956) 15.748,28.952 16.506,28.194 U7.7 ; U8.1 17.099,7.189 17.145,7.143 v1(17.145,6.477) ; U10.16 21.869,20.574 22.794,19.649 22.794,18.547 C20.2 ; U1.16 21.283,7.239 21.283,7.012 21.807,6.489 22.033,6.489 22.65,5.873 22.65,5.156 C21.2@22.799,5.007 ; v1(21.971,18.034) 22.025,18.034 22.133,18.142 22.599,18.142 C20.2@22.799,18.342 ; U10.2 v1(27.432,21.844) ; U5.16 30.464,7.239 v1(31.362,6.341) 31.362,5.407 C14.2 31.562,5.007 C14.2@31.362,4.807 ; U14.16 30.43,20.624 31.165,19.888 31.369,19.685 v1(31.423,19.685) 31.461,19.647 31.461,18.643 C16.2
  L1 w0.762: H2.24@4.957,31.943 5.043,32.029 H2.24
  L3 w0.5: v1(9.779,8.509) 12.281,11.011 13.297,11.011 v1(13.335,11.049)
  L3 w1: H2.24@5.043,32.029 H2.24
  L4 w0.5: 4.953,20.574 7.811,20.574 7.857,20.528 ; 6.909,30.048 9.652,30.048 10.465,29.235 14.961,29.235 15.216,28.98 15.724,28.98 v1(15.748,28.956) ; 10.714,20.528 12.281,18.961 12.281,18.199 v1(12.319,18.161) 18.288,18.161 19.05,17.399 21.289,17.399 21.924,18.034 30.226,18.034 30.624,18.432 30.624,18.886 v1(31.423,19.685) 31.369,19.685 30.524,20.53 30.524,20.911 29.591,21.844 v1(27.432,21.844)
  L4 w0.8: v1(9.779,8.509) 12.319,11.049 v1(13.335,11.049) 14.478,12.192 v1(15.748,12.192) ; v1(17.145,6.477) 17.199,6.477 17.453,6.731 21.737,6.731 22.018,6.451 v1(22.072,6.451) ; v1(31.362,6.341) 31.369,6.348 31.369,7.112 32.004,7.747 34.544,7.747 35.367,6.924 v1(35.367,6.223)
  L4 w1: v1(4.191,6.604) 2.159,8.636 2.159,19.214 ; 4.953,20.574 v1@3.519,20.574 ; H2.24 5.043,22.098 v1@3.519,20.574 ; 2.159,19.214 v1@3.519,20.574 ; 2.159,19.214 2.159,19.304 v1(3.429,20.574) v1@3.519,20.574
  L6 w0.5: R5.1 5.395,29.52 4.652,28.777 4.652,26.971 4.953,26.67 U6.7 ; C17.2 9.84,17.345 10.04,17.545 10.24,17.545 10.856,18.161 v1(12.319,18.161) 12.319,18.195 11.96,18.554 11.96,19.034 11.944,19.05 U6.16@11.55,19.05 ; U6.16@11.102,19.004 11.504,19.004 U6.16@11.55,19.05 ; U6.16 U6.16@11.55,19.05 ; U9.4 11.843,11.211 13.118,11.211 13.281,11.049 v1(13.335,11.049) ; U9.14 17.446,7.421 17.4,7.374 17.4,6.901 17.183,6.684 17.183,6.515 v1(17.145,6.477) 17.183,6.439 17.183,6.324 18.1,5.407 C19.2 ; C23.2@21.143,17.018 21.143,17.218 22.906,18.981 23.835,18.981 U11.16 ; v1@22.059,6.464 v1(22.072,6.451) ; v1(31.362,6.341) v1@31.4,6.379 ; v1(31.423,19.685) 31.748,19.36 35.33,19.36 35.358,19.332 35.422,19.395 38.638,19.395 C25.2 ; C18.2 v1(35.367,6.223) 35.367,7.92 U13.16
  L6 w0.6: U4.13 8.44,8.505 ; D1.2@8.803,6.411 8.778,6.411 8.44,6.749 U4.14 8.44,8.505 ; v1(9.779,8.509) 8.444,8.509 8.44,8.505
  L6 w0.762: R5.1 R5.1@5.395,30.353 ; H2.23 H2.24 5.043,31.928 5.395,31.576 R5.1@5.395,30.353 ; R4.2 7.239,29.845 6.731,30.353 R5.1@5.395,30.353
NetC1_2: C1.2 U5.2 U5.12 | length 12.8
  L1 w0.254: v1(33.274,9.525) 34.29,8.509 U5.2
  L1 w0.381: U5.12@29.364,12.319 U5.12 31.791,12.319 31.918,12.446 v1(32.004,12.446) ; U5.2 37.941,8.509 38.759,9.327 C1.2
  L3 w0.3: v1@33.236,9.487 v1(33.274,9.525)
  L6 w0.381: v1(32.004,12.446) 33.274,11.176 v1(33.274,9.525)
NetC2_2: C2.2 U5.4 U5.14 | length 10.6
  L1 w0.381: U5.14 32.131,9.779 33.401,11.049 36.671,11.049 38.759,13.137 C2.2
NetC3_2: C3.2 U5.1 U5.15 | length 10.1
  L1 w0.381: U5.15 32.639,8.509 33.909,7.239 U5.1 37.687,7.239 38.759,6.167 C3.2
NetC4_2: C4.2 U5.5 U5.11 | length 12.8
  L1 w0.381: U5.11 32.258,13.589 33.528,12.319 U5.5 36.168,12.319 37.625,13.776 37.625,15.813 38.759,16.947 C4.2
NetC5_2: C5.2 C6.2 C7.2 C8.2 C9.2 C10.2 C11.2 C12.2 C13.2 D4.2 R8.2 U13.7 U14.7 | length 66.8
  L1 w0.5: U14.7 39.066,28.244 40.132,27.178 v1(40.132,24.384) 40.132,22.733 42.051,20.814 D4.2
  L6 w0.5: R8.2 23.434,5.507 23.646,5.719 C9.2 C7.2 C6.2 C8.2@23.646,16.002 ; C8.2 23.646,16.454 24.972,17.78 31.076,17.78 ; U13.7 30.653,15.54 31.076,15.963 31.076,17.78 ; v1(40.132,24.384) 38.849,24.384 C5.2 38.468,23.69 38.968,23.19 39.675,23.19 42.037,20.828 42.037,17.907 ; C11.2 41.876,7.835 41.876,15.942 C10.2 42.037,16.103 42.037,17.907 ; 31.076,17.78 31.685,18.389 36.602,18.389 37.084,17.907 42.037,17.907
NetC6_1: C6.1 U13.4 U14.12 | length 21
  L1 w0.4: U14.12 29.939,25.679 31.339,25.679 v1(31.364,25.654) 31.364,25.642 v1@31.332,25.61
  L3 w0.3: v1(27.877,12.255) 26.924,13.208 26.924,17.018 30.099,20.193 30.099,21.717 30.937,22.555 30.937,25.119 31.364,25.546 v1(31.364,25.654)
  L6 w0.4: C6.1 26.646,12.841 27.021,12.466 27.666,12.466 v1(27.877,12.255) 28.402,11.73 U13.4
NetC7_1: C7.1 U13.2 U14.15 | length 20.2
  L1 w0.3: U14.15 31.7,21.894 v1(31.75,21.844)
  L3 w0.3: v1(28.402,9.19) 29.416,10.204 29.416,15.954 32.385,18.923 32.385,21.209 v1(31.75,21.844)
  L6 w0.5: C7.1 26.646,10.131 26.971,9.806 27.786,9.806 v1(28.402,9.19) U13.2
NetC8_1: C8.1 U13.5 U14.14 | length 14.4
  L1 w0.254: v1(27.841,16.129) 27.821,16.149 27.821,18.065 28.41,18.655 28.41,22.135 29.439,23.164 U14.14
  L6 w0.3: v1(27.841,16.129) C8.1 27.071,15.704 27.071,14.966 28.067,13.97 28.067,13.589 28.617,13.039 29.642,13.039 U13.5
NetC9_1: C9.1 U13.1 U14.13 | length 23.5
  L1 w0.381: U14.13 31.065,24.434 v1(31.75,23.749)
  L3 w0.3: v1(28.448,7.92) 30.099,9.571 30.099,15.621 33.02,18.542 33.02,22.479 v1(31.75,23.749)
  L6 w0.381: C9.1 27.994,7.747 28.167,7.92 v1(28.448,7.92) U13.1
NetC10_1: C10.1 U13.12 U14.4 | length 16.3
  L1 w0.5: U14.4 35.647,24.463 36.855,24.463 36.903,24.511 v1(36.957,24.511)
  L3 w0.5: v1(36.957,24.511) 36.957,24.457 37.211,24.203 v1(37.211,16.764)
  L6 w0.5: U13.12 36.259,13 38.886,15.627 C10.1 38.886,16.277 38.561,16.602 38.236,16.602 38.112,16.726 37.249,16.726 v1(37.211,16.764)
NetC11_1: C11.1 U13.15 U14.2 | length 23.1
  L1 w0.254: U14.2 38.564,21.894 38.741,21.717 v1(38.862,21.717)
  L3 w0.254: v1(38.862,21.717) 38.862,21.596 39.116,21.342 39.116,9.017 v1(40.132,8.001)
  L6 w0.254: C11.1 39.834,7.824 40.011,8.001 v1(40.132,8.001)
  L6 w0.381: U13.15 36.696,9.19 37.352,8.534 38.481,8.534 38.865,8.149 C11.1
NetC12_1: C12.1 U13.14 U14.5 | length 24.3
  L1 w0.381: U14.5 35.643,25.679 37.059,25.679 v1(37.084,25.654)
  L3 w0.381: v1(37.084,25.654) 39.878,22.86 39.878,19.507 41.859,17.526 41.859,12.268 v1(40.005,10.414)
  L6 w0.381: U13.14 35.966,10.46 36.207,10.701 38.719,10.701 39.006,10.414 v1(40.005,10.414)
NetC13_1: C13.1 U13.13 U14.1 | length 16.5
  L1 w0.381: U14.1 36.093,20.624 37.667,19.05 39.878,19.05 40.386,18.542 v1(40.386,13.716)
  L6 w0.381: U13.13 37.698,11.73 38.886,12.918 C13.1 39.913,13.243 v1(40.386,13.716)
NetD1_1: D1.1 R2.1 U3.9 U4.12 | length 16.6
  L1 w0.254: U3.9 2.322,13.564 4.42,13.564 v1(4.445,13.589)
  L6 w0.254: v1(4.445,13.589) 5.004,13.03 5.004,12.141 6.223,10.922 6.223,10.41 6.223,10.287 ; U4.12 6.346,10.41 6.223,10.287 ; D1.1@8.803,4.511 6.631,4.511 6.482,4.66 6.482,5.009 6.223,5.268 6.223,10.287
NetD1_3: D1.3 R1.2 | length 2.3
  L6 w0.381: D1.3@11.303,5.461 13.333,5.461 13.467,5.326 R1.2
NetD2_1: D2.1 D3.2 | length 3.3
  L1 w0.381: D2.1 D3.2
NetD3_1: D3.1 R3.1 U5.13 | length 33.7
  L1 w0.4: U5.13 v1(32.004,11.049) ; R3.1 40.828,29.391 v1@42.051,28.168 ; D3.1 v1@42.051,28.067
  L3 w0.4: v1(42.164,28.067) 42.164,27.986 41.961,27.783 41.961,21.184 43.104,20.041 v1(43.104,11.811)
  L4 w0.3: v1(32.004,11.049) 37.173,11.049 37.935,11.811 v1(43.104,11.811)
NetR7_1: R7.1 U8.3 | length 4
  L1 w0.254: U8.3 18.487,9.729 v1(19.421,10.663)
  L6 w0.254: v1(19.421,10.663) 20.254,10.663 R7.1
NetR7_2: R7.2 U9.13 | length 2.6
  L6 w0.381: U9.13 19.982,8.691 20.247,8.956 R7.2
NetU1_10: U1.10 U5.10 | length 15.6
  L1 w0.381: U1.10 20.756,14.882 22.065,14.882 22.139,14.955 v1(22.225,14.955) ; v1(28.448,14.859) U5.10
  L3 w0.3: v1(22.225,14.955) 25.05,14.955 26.289,13.716 26.289,11.938 27.051,11.176 28.067,11.176 28.804,11.913 28.804,13.083 28.448,13.438 v1(28.448,14.859)
NetU1_11: U1.11 U5.9 | length 24
  L1 w0.381: U1.11 21.316,13.589 21.636,13.269 22.037,13.269 v1(22.098,13.208) ; U5.9 v1(32.223,16.129)
  L3 w0.3: v1(22.098,13.208) 22.175,13.131 22.175,12.877 22.643,12.409 27.94,7.112 29.337,7.112 30.988,8.763 30.988,12.827 31.927,13.766 31.927,15.725 32.223,16.021 v1(32.223,16.129)
NetU2_1: U2.1 U2.6 U4.6 U4.8 | length 20.4
  L1 w0.381: v1(6.35,15.875) 7.747,17.272 7.747,18.523 8.214,18.989 8.214,20.473 8.113,20.574 7.322,20.574 6.096,21.8 6.096,25.698 7.322,26.924 U2.6
  L6 w0.381: U4.6 3.497,14.22 3.976,14.699 5.047,14.699 6.223,15.875 v1(6.35,15.875) 7.112,15.875 7.478,15.509 8.421,15.509 U4.8
NetU3_6: U3.6 U3.10 | length 6.3
  L1 w0.3: U3.10 4.522,12.269 6.138,13.885 6.899,13.885 7.245,13.539 U3.6
NetU4_1: U4.1 U4.2 U4.5 U6.4 | length 20.3
  L6 w0.254: U4.1 U4.2 3.465,9.14 4.096,9.771 4.096,12.319 3.465,12.95 U4.5 2.515,12.95 1.397,14.068 1.397,19.812 4.445,22.86 U6.4
NetU7_10: U7.10 U7.15 | length 7.8
  L1 w0.3: U7.15 11.406,21.916 10.981,21.916 10.308,22.588 10.308,27.45 10.981,28.122 11.406,28.122 U7.10
NetU8_8: U8.8 U10.12 U12.7 | length 29.9
  L1 w0.254: v1(11.43,16.002) 11.43,14.857 U8.8 ; v1(19.558,25.781) 19.638,25.701 20.611,25.701 U10.12
  L3 w0.254: v1@11.43,16.02 11.43,23.622 v1(13.589,25.781)
  L4 w0.254: v1(13.589,25.781) v1(19.558,25.781) 20.32,26.543 v1(28.448,26.543)
  L6 w0.254: v1(28.448,26.543) 28.569,26.543 28.854,26.828 29.846,26.828 U12.7
NetU8_9: U8.9 U11.3 | length 15.9
  L1 w0.305: U8.9 13.285,13.539 14.122,14.376 14.122,15.519 17.145,18.542 v1(19.558,18.542)
  L6 w0.305: U11.3 18.848,21.547 19.558,20.837 v1(19.558,18.542)
NetU9_2: U9.2 U9.3 | length 1.3
  L6 w0.381: U9.2 U9.3
NetU10_5: U10.5 U12.5 | length 4.5
  L1 w0.254: U10.5 27.305,25.654 28.448,24.511 v1(28.448,24.384)
  L6 w0.254: v1(28.448,24.384) 28.476,24.412 29.97,24.412 U12.5
NetU10_6: U10.6 U10.10 | length 6
  L1 w0.5: U10.10 22.098,28.194 23.368,26.924 U10.6
NetU11_7: U11.7 U11.15 | length 12
  L6 w0.381: U11.7 20.363,26.627 20.574,26.416 20.828,26.162 20.828,21.819 22.37,20.277 U11.15
NetU12_10: U12.10 U13.11 U14.11 | length 21.9
  L1 w0.254: U14.11 31.573,26.974 v1(31.623,26.924) 31.623,26.838 32.223,26.238 32.223,24.673 33.02,23.876 33.02,20.447 32.512,19.939 32.512,17.763 33.02,17.255 33.02,15.802 32.935,15.717 32.935,14.901 v1(32.893,14.859)
  L6 w0.381: v1(31.623,26.924) 31.709,26.924 32.313,26.32 34.315,26.32 34.475,26.479 34.484,26.479 34.984,26.98 U12.10 ; v1(32.893,14.859) 32.979,14.859 33.52,14.318 34.481,14.318 34.507,14.293 35.361,14.293 U13.11
NetU12_11: U12.11 U13.10 U14.10 | length 22.2
  L1 w0.305: U14.10 29.939,28.219 31.979,28.219 v1(32.004,28.194)
  L3 w0.305: v1(32.004,28.194) 33.02,27.178 v1(33.02,25.4) 33.127,25.4 33.381,25.654 34.798,25.654 36.195,24.257 36.195,16.129 v1(36.83,15.494)
  L6 w0.305: v1(33.02,25.4) 33.127,25.4 33.437,25.71 U12.11 ; U13.10 36.784,15.54 v1(36.83,15.494)
NetU12_12: U12.12 U13.9 U14.9 | length 18
  L1 w0.254: U14.9 32.335,29.514 32.893,28.956 32.893,26.924 34.036,25.781 v1(34.036,24.511)
  L3 w0.254: v1(34.036,24.511) 35.433,23.114 35.433,17.901 35.188,17.656 v1(35.188,17.535)
  L6 w0.254: v1@34.036,24.475 35.386,24.475 U12.12 ; v1(35.188,17.535) 35.188,16.924 35.302,16.81 U13.9
pads on no net: U1.12 U1.13 U1.14 U2.3 U2.4 U2.5 U2.11 U2.12 U2.13 U2.14 U3.3 U6.2 U6.3 U6.5 U6.10 U6.11 U6.13 U7.3 U7.4 U7.5 U7.11 U7.12 U7.13 U8.4 U10.11 U11.1 U11.2 U11.4 U11.5 U11.6 U11.9 U11.10 U11.11 U11.12 U12.13 U12.14

## Polygon pours and split planes (outlines as drawn)
2_47 on L4 "2_47_L04_P000" (solid, remove dead copper, pour order 0): 2.54,32.639 2.54,21.59 1.27,20.32 1.27,7.62 3.81,5.08 36.83,5.08 36.83,26.975 7.62,26.975 7.62,33.782 2.54,33.782
2_1 on L2 (split plane): 43.66,0.446 0.511,0.51 0.559,34.181 43.66,34.181
2_1 on L5 (split plane): 43.66,0.446 0.511,0.51 0.559,34.181 43.66,34.181

## Keep-outs
Keep-Out Layer:
  lines w0.254: 0.049,34.688 0,0 44.171,-0.065 44.171,34.692 0.049,34.692

## Silkscreen, mask and mechanical layers (free items; w line width, h text height)
Top Overlay:
  lines w0.254: 0.127,0 44.196,0 44.196,34.671 0.127,34.671 0.127,0